# Altium PCB KATADC_V1-3.PcbDoc (part 1 of 7)
Units mm, origin at the board's own origin, x right, y up, seen from the top; angles counter-clockwise.
Board outline 127 x 85.85 mm, 6 copper layers (Top Layer, InnerPlane1, InnerPlane2, InnerPlane3, InnerPlane4, Bottom Layer), stack 1.255 mm thick; 189 components, 188 nets, 905 pads, 1090 vias.
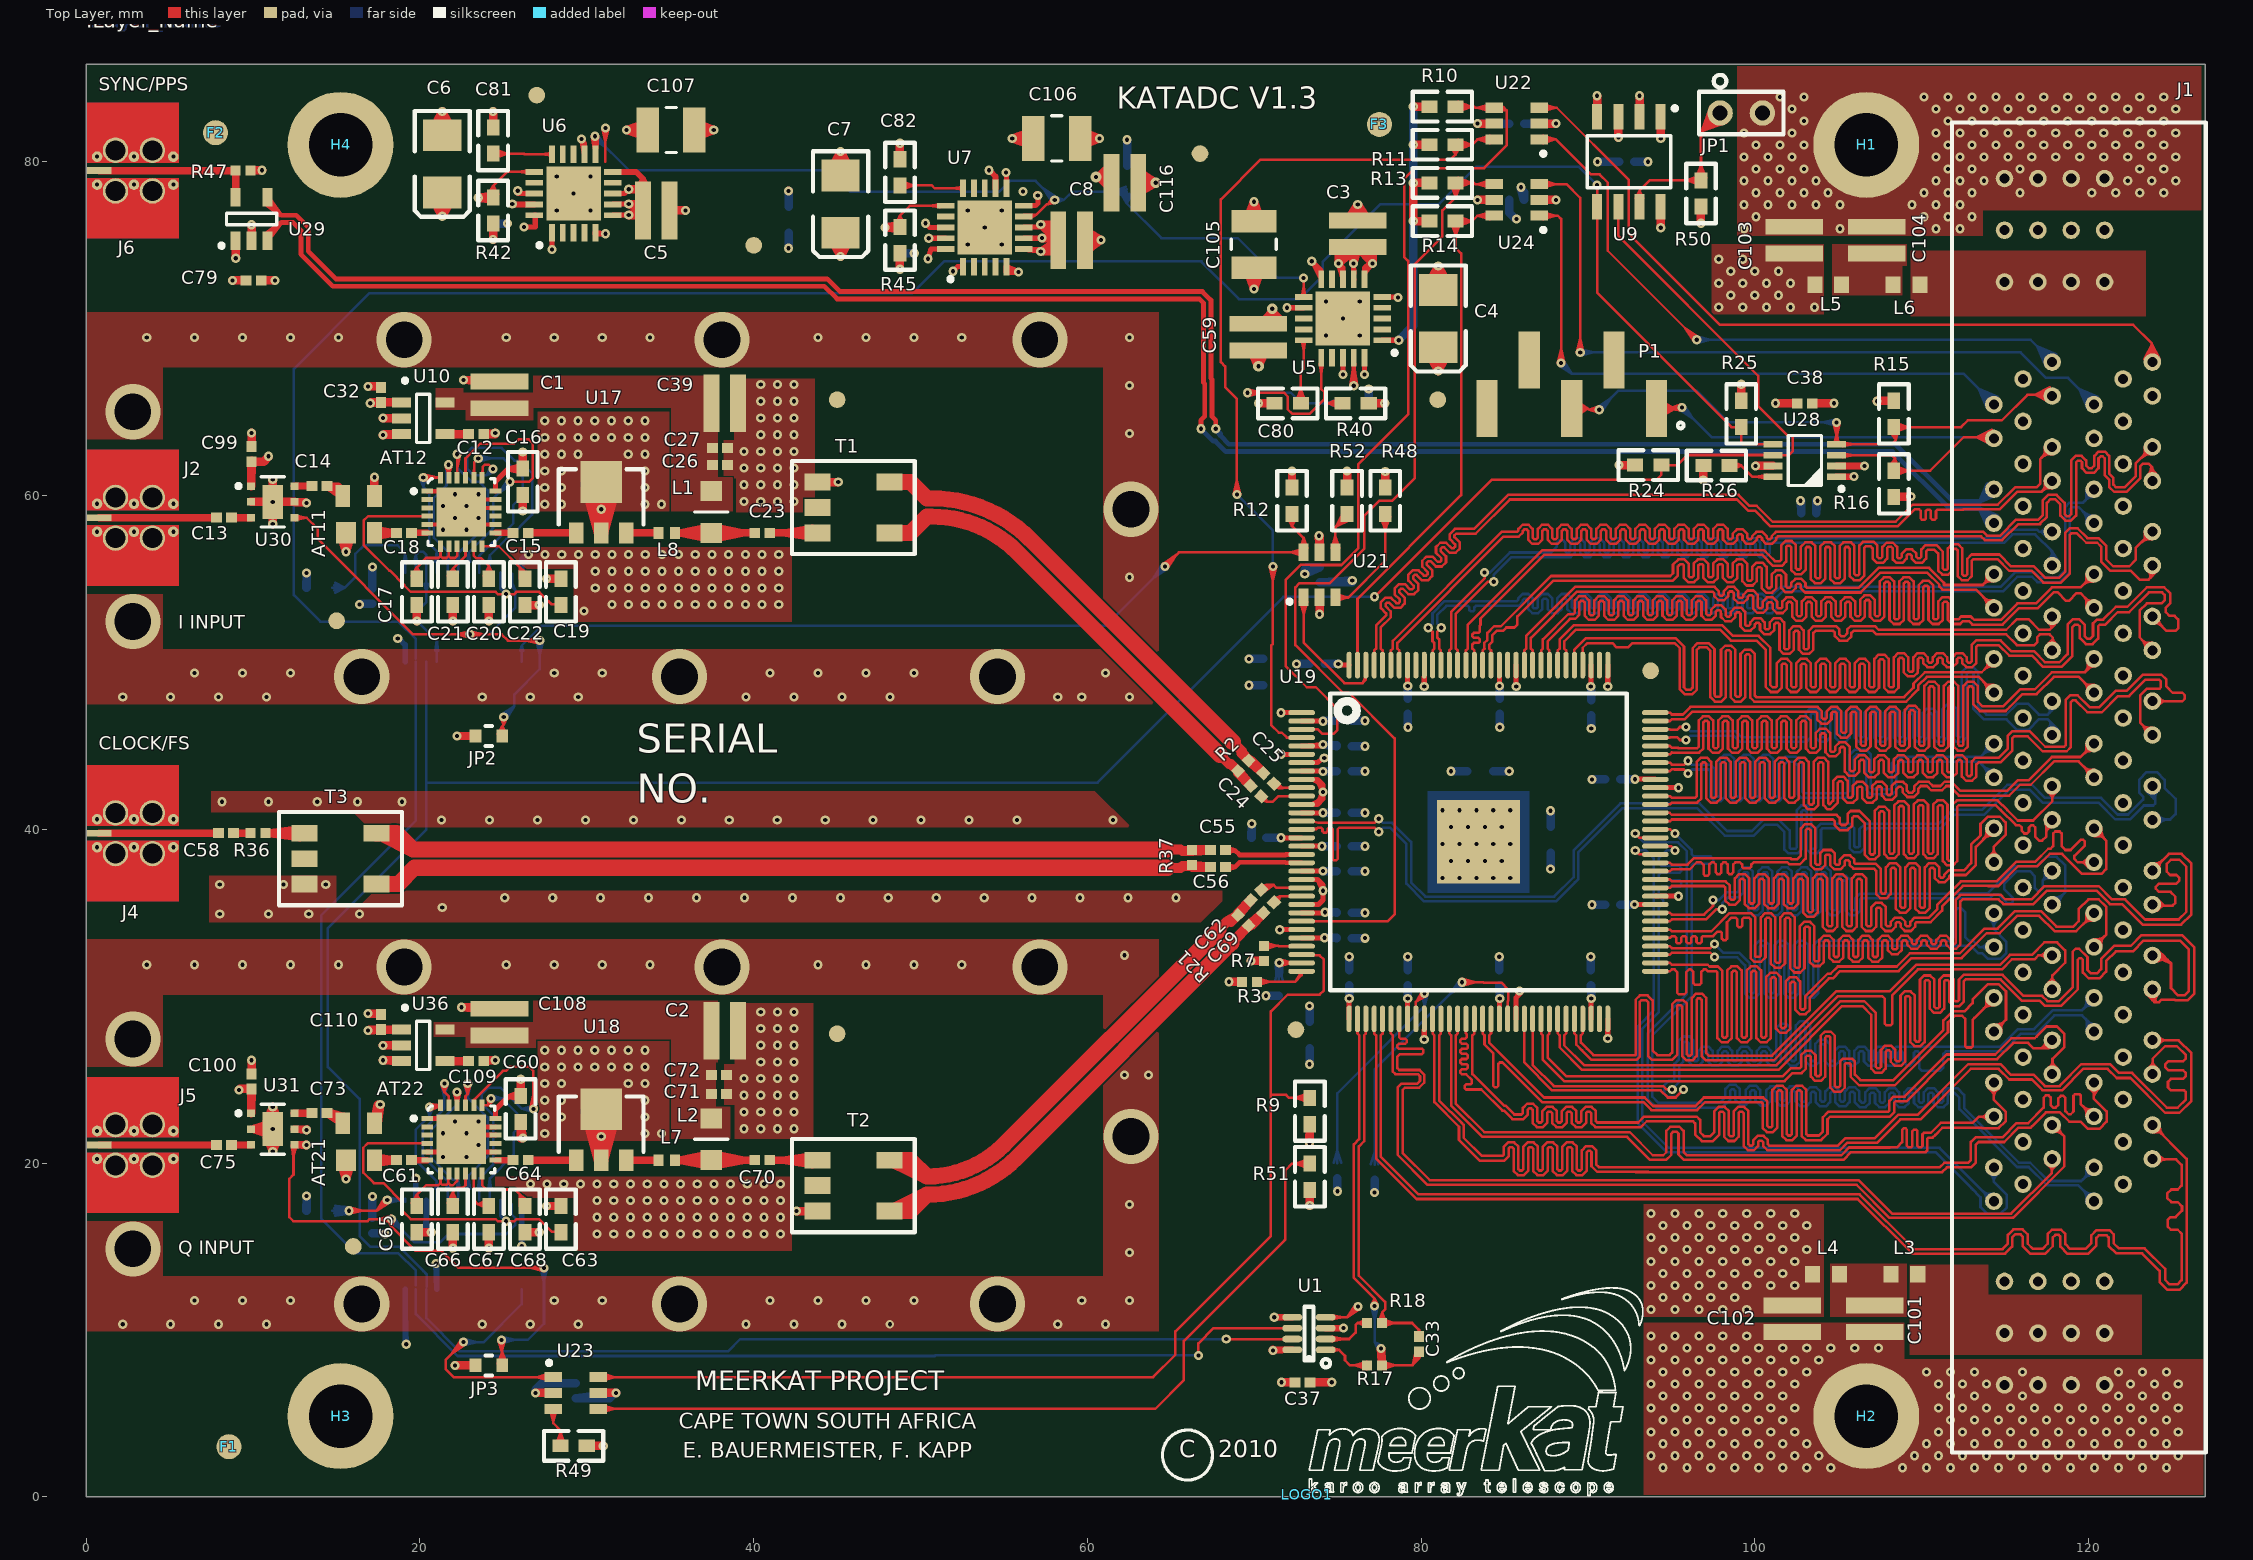
[diagram p0: Top Layer view]
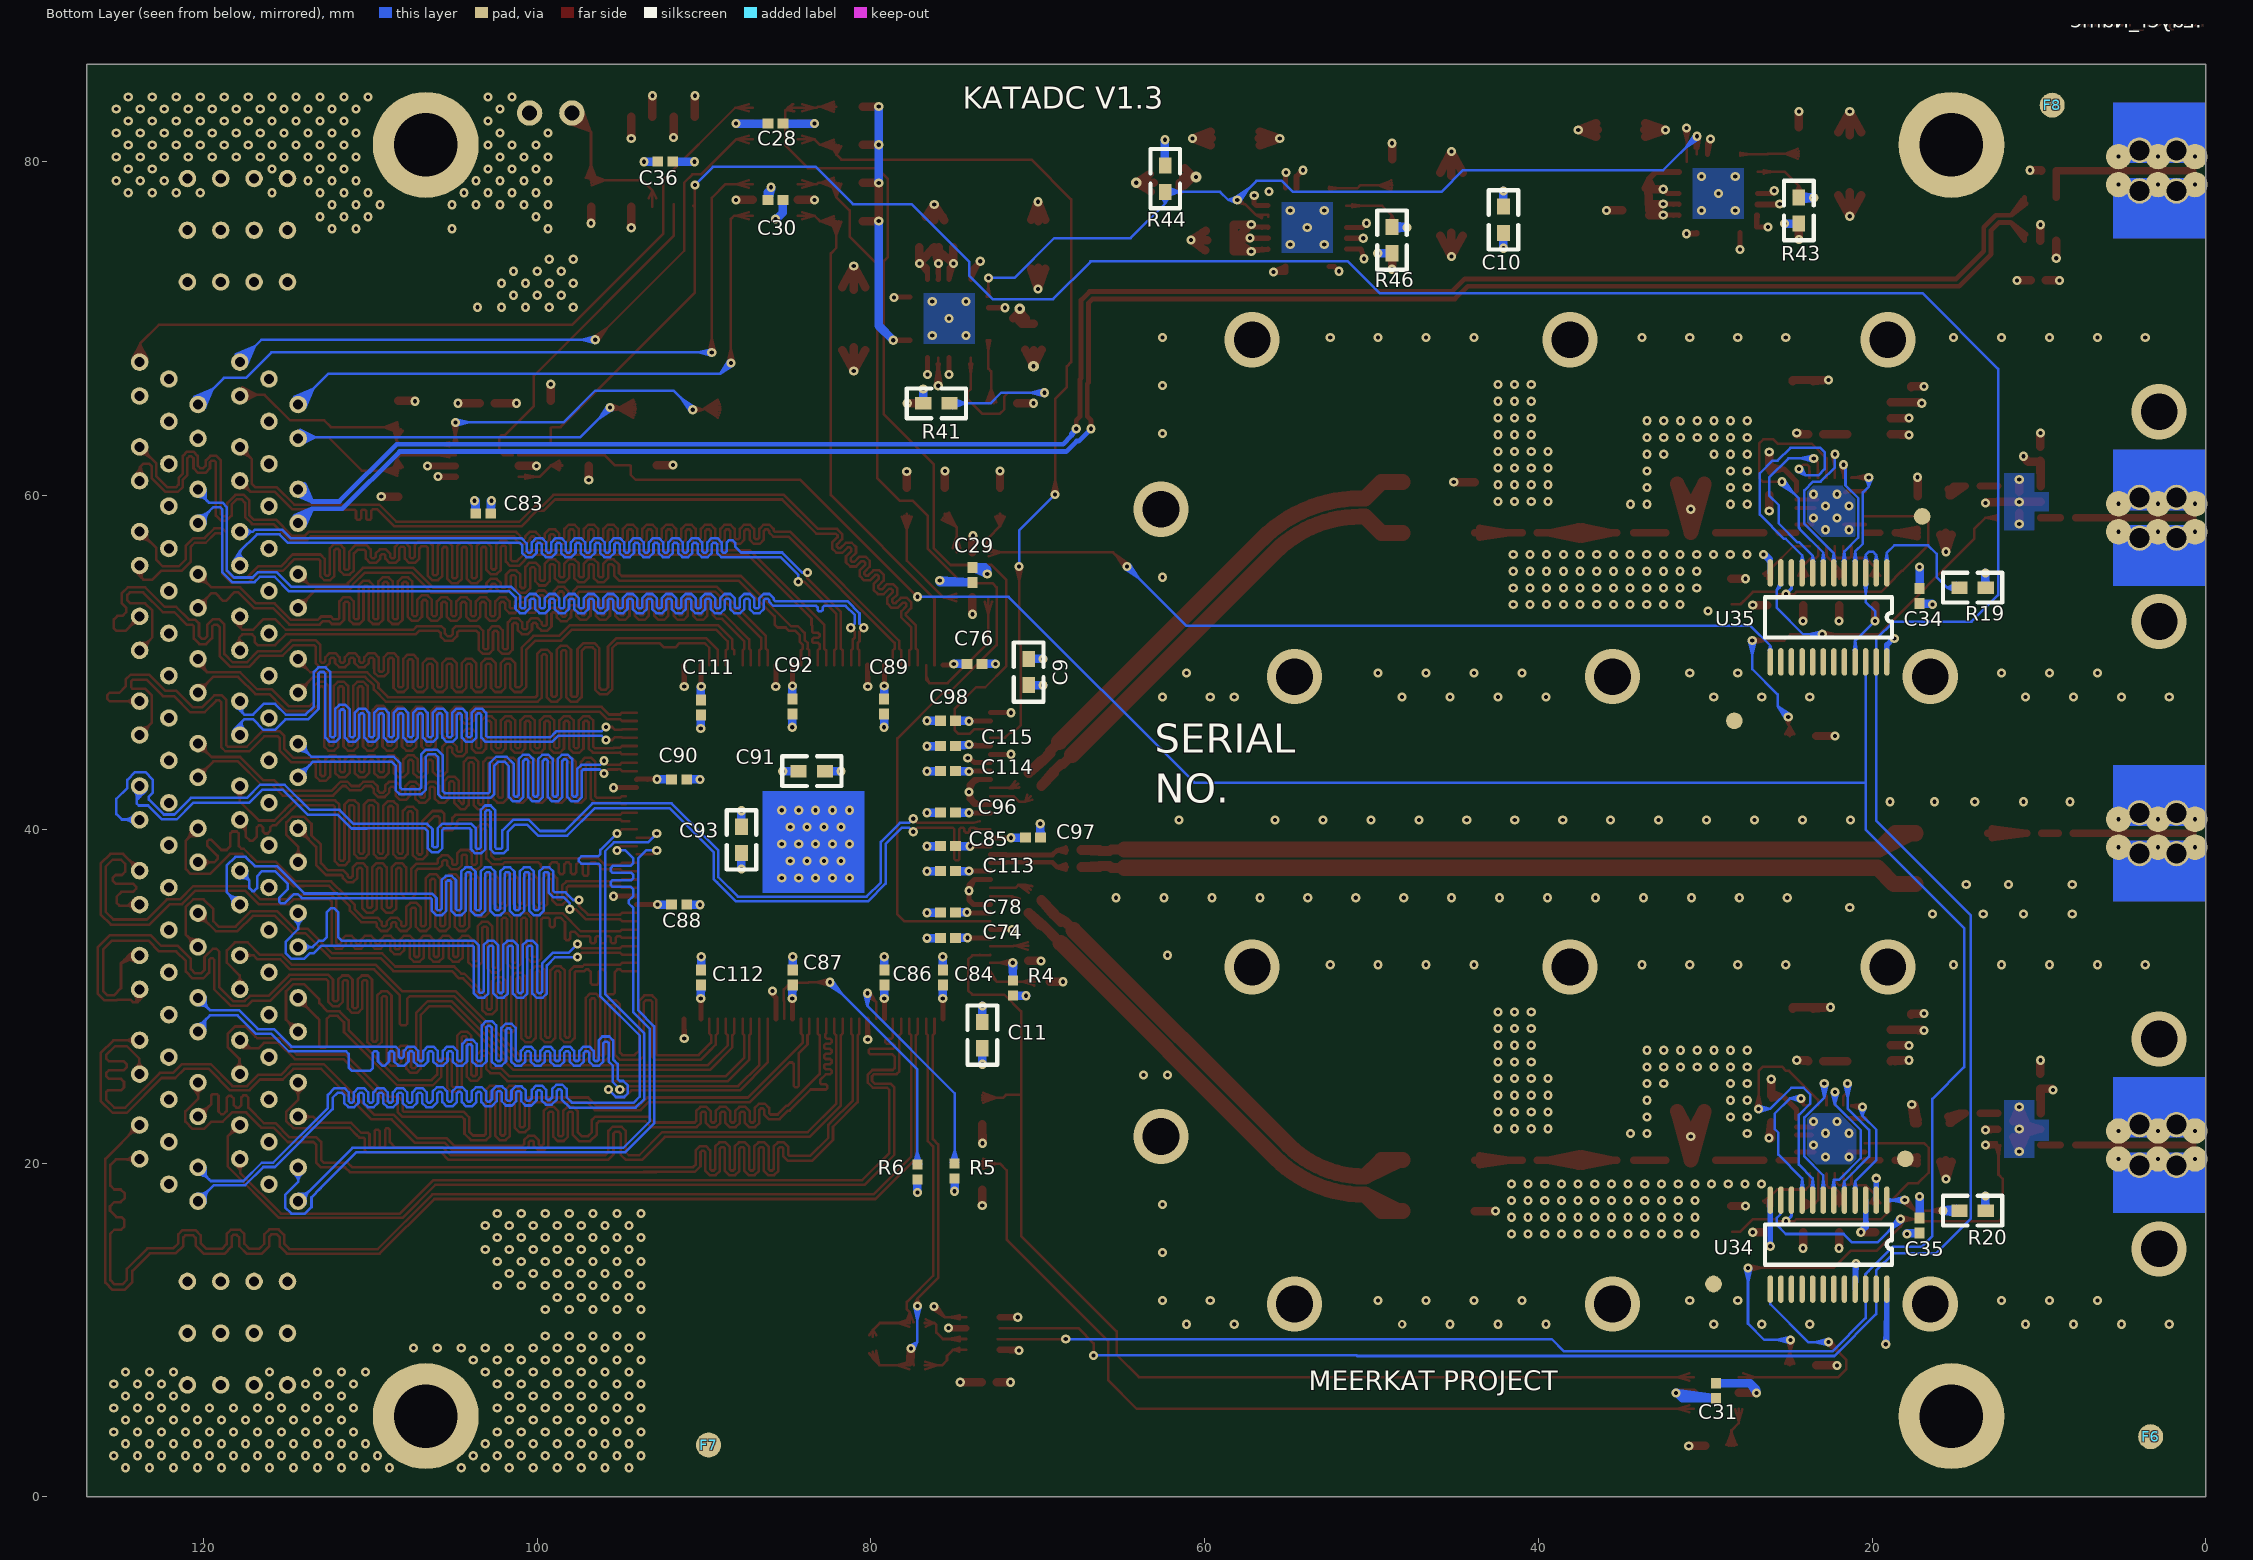
[diagram p1: Bottom Layer view, seen from below]
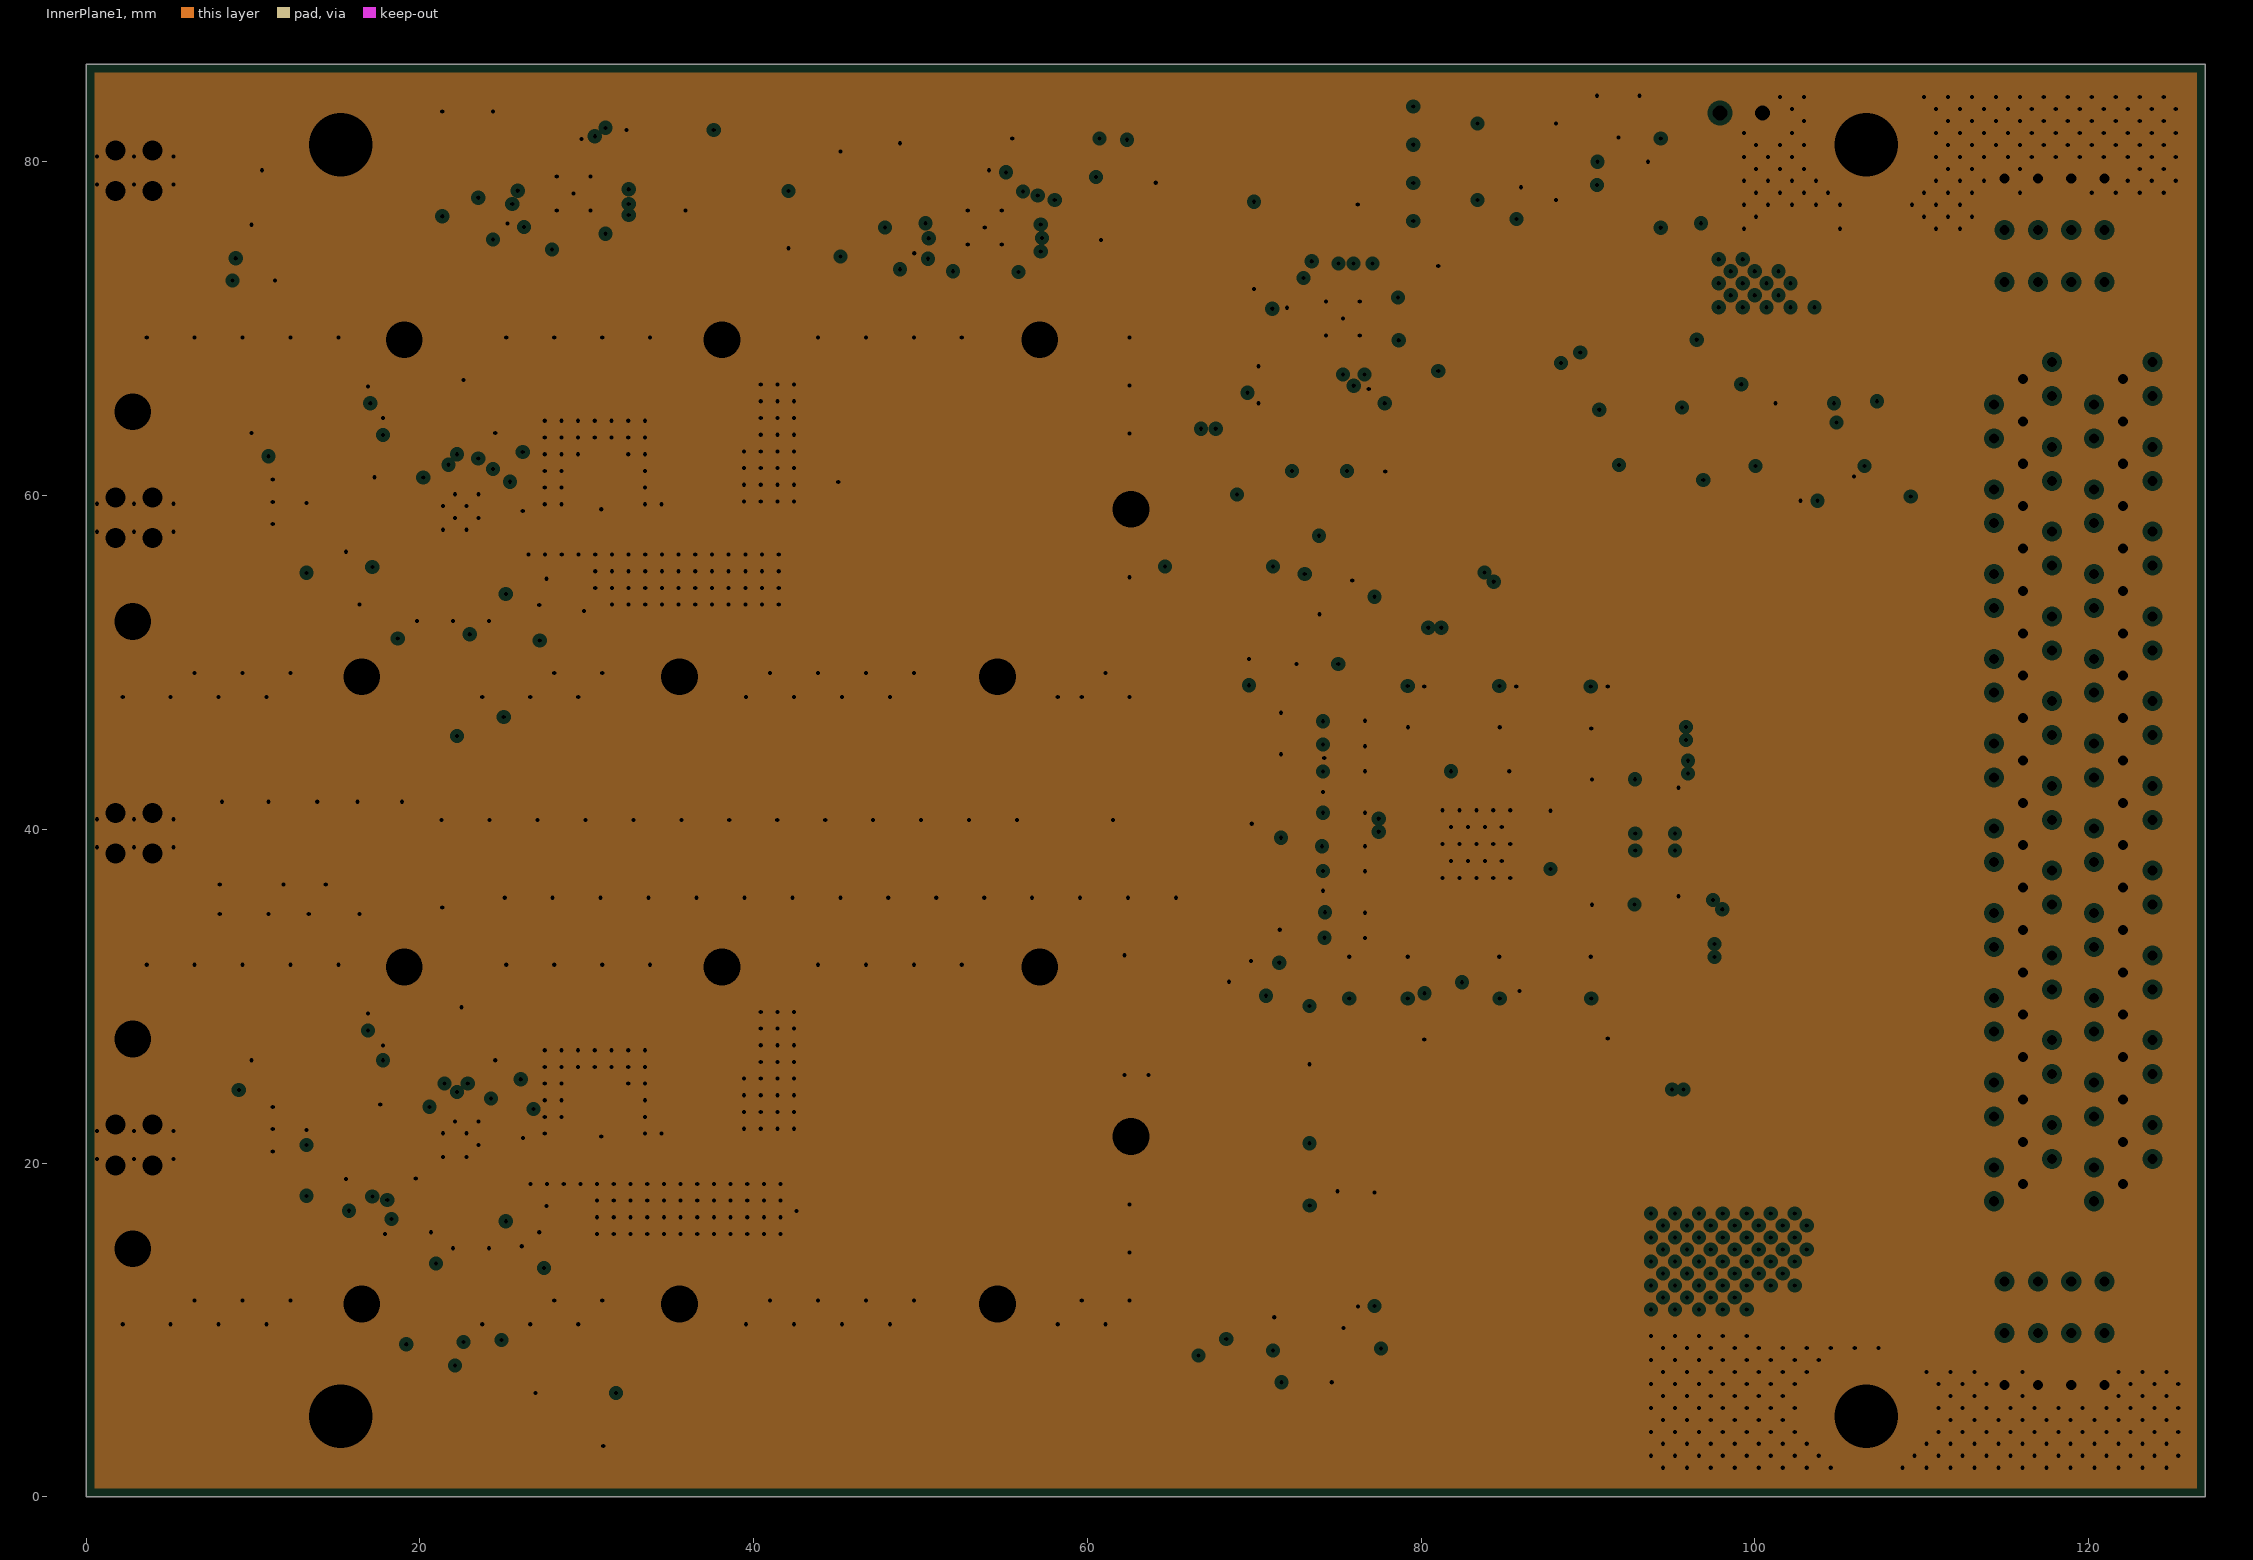
[diagram p2: InnerPlane1, clearances drawn from the general rule]
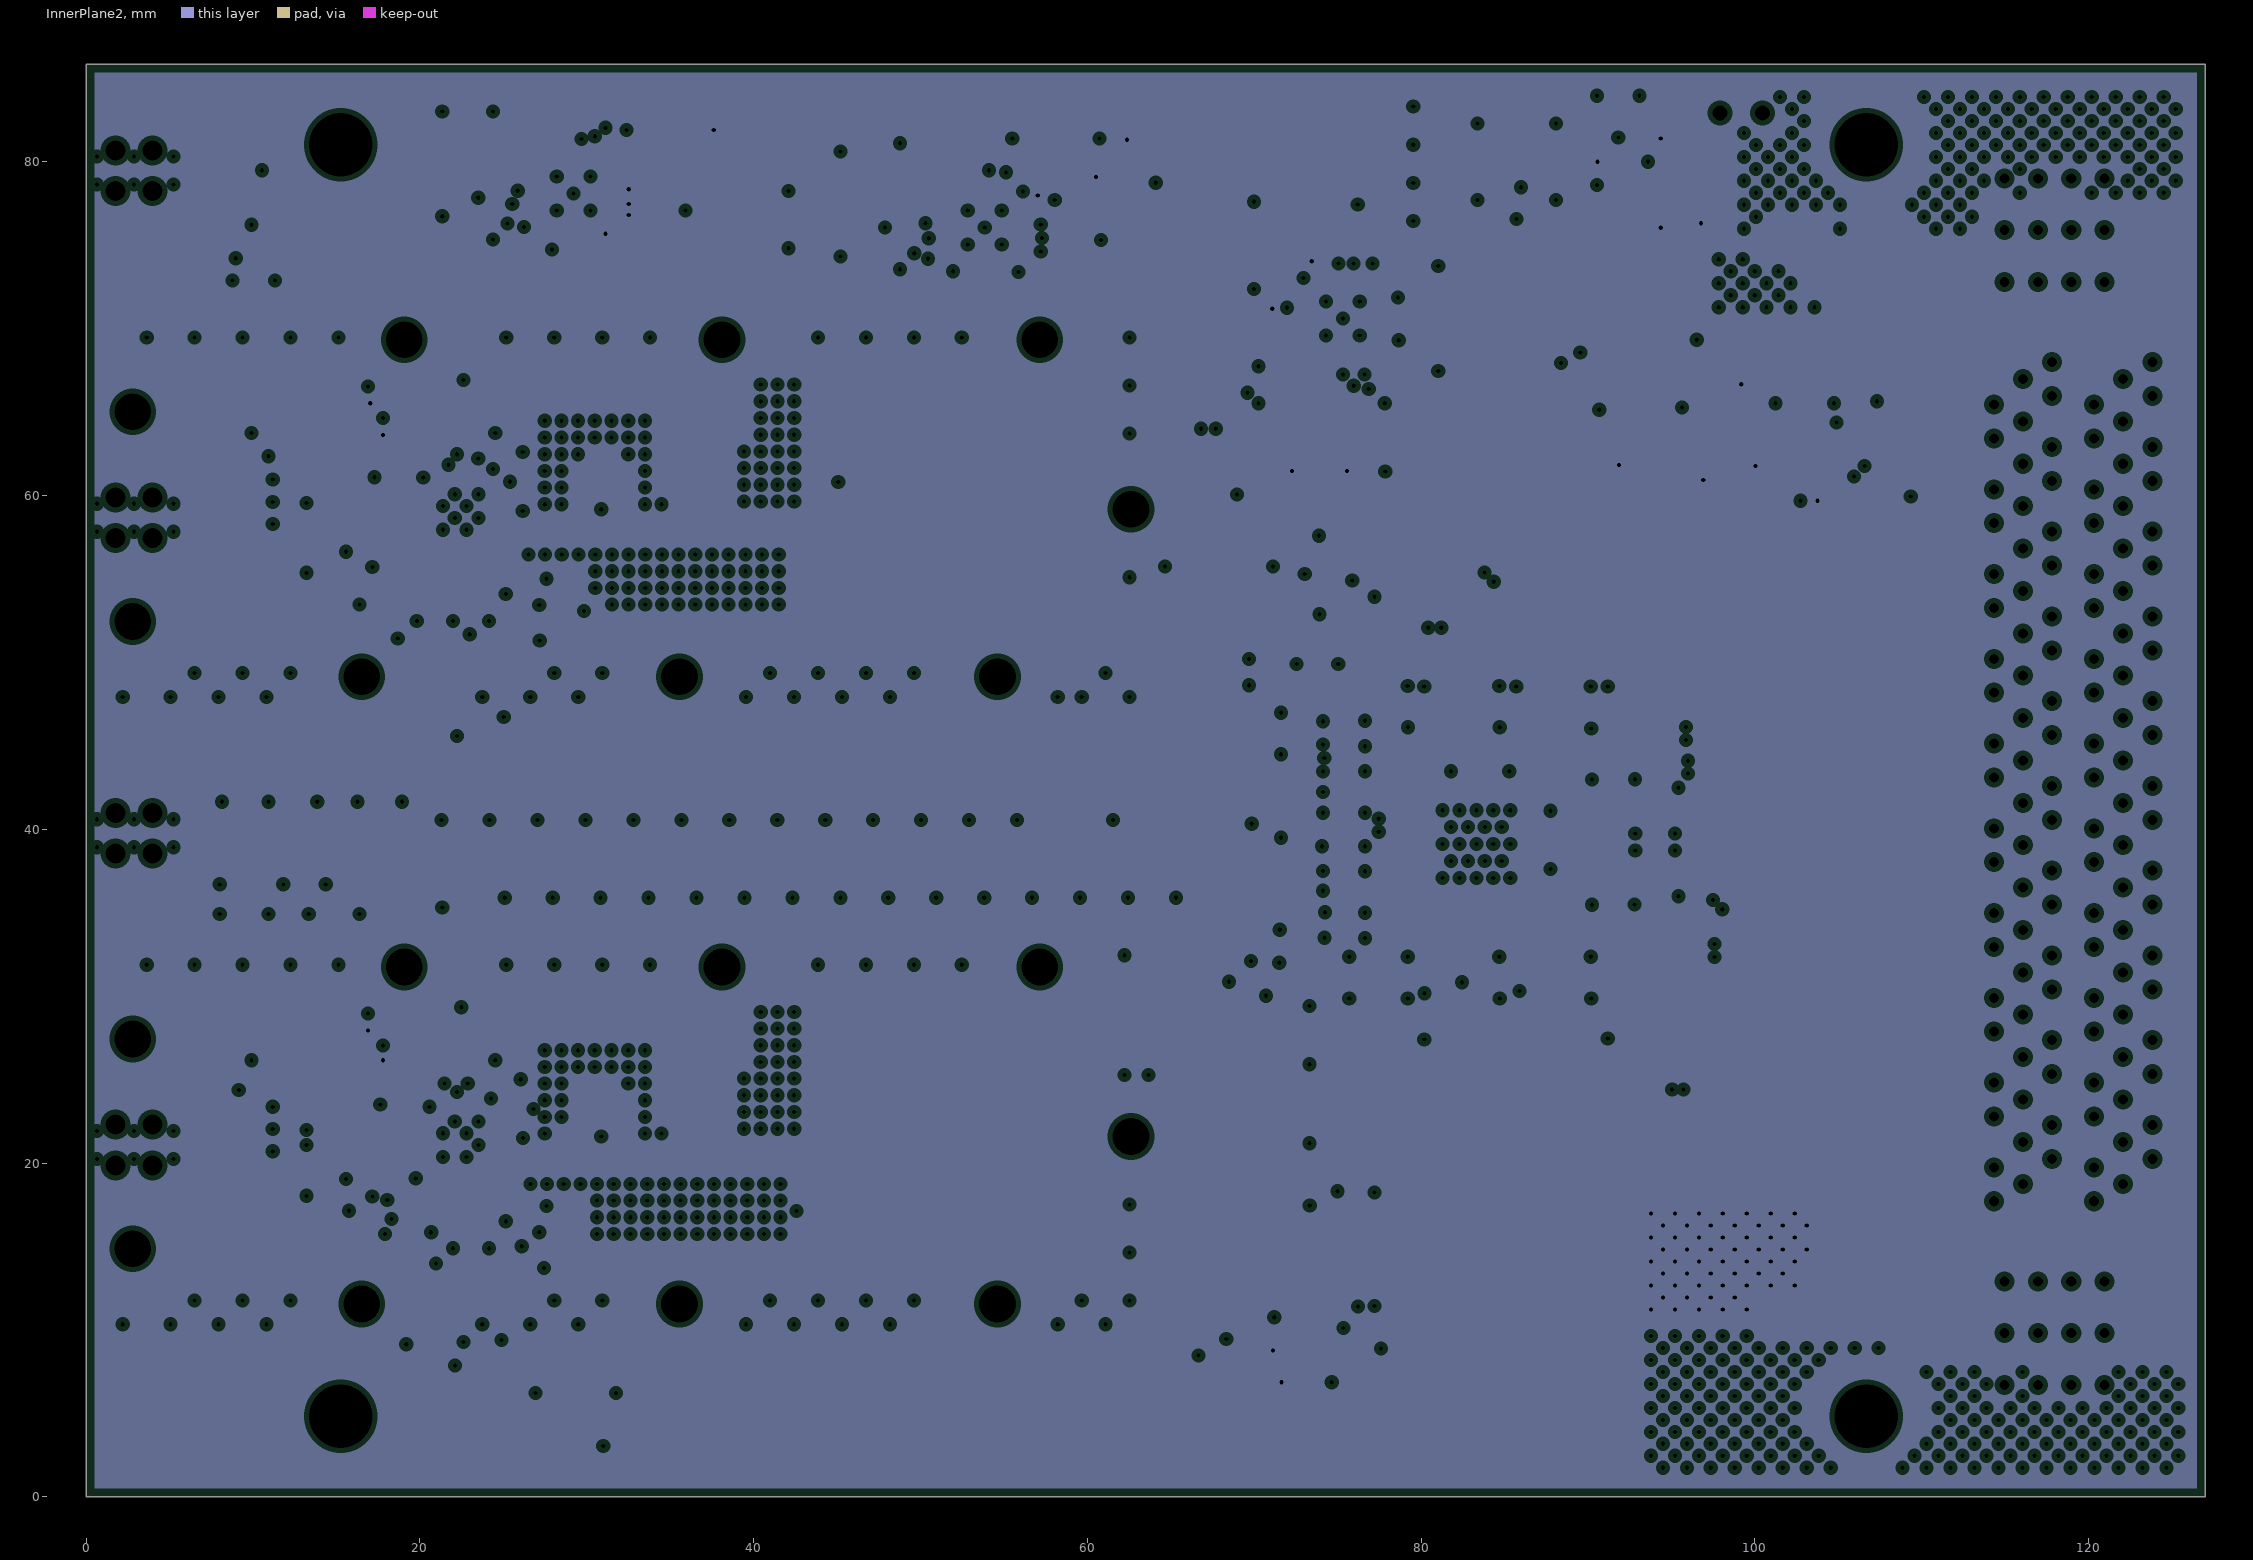
[diagram p3: InnerPlane2, clearances drawn from the general rule]
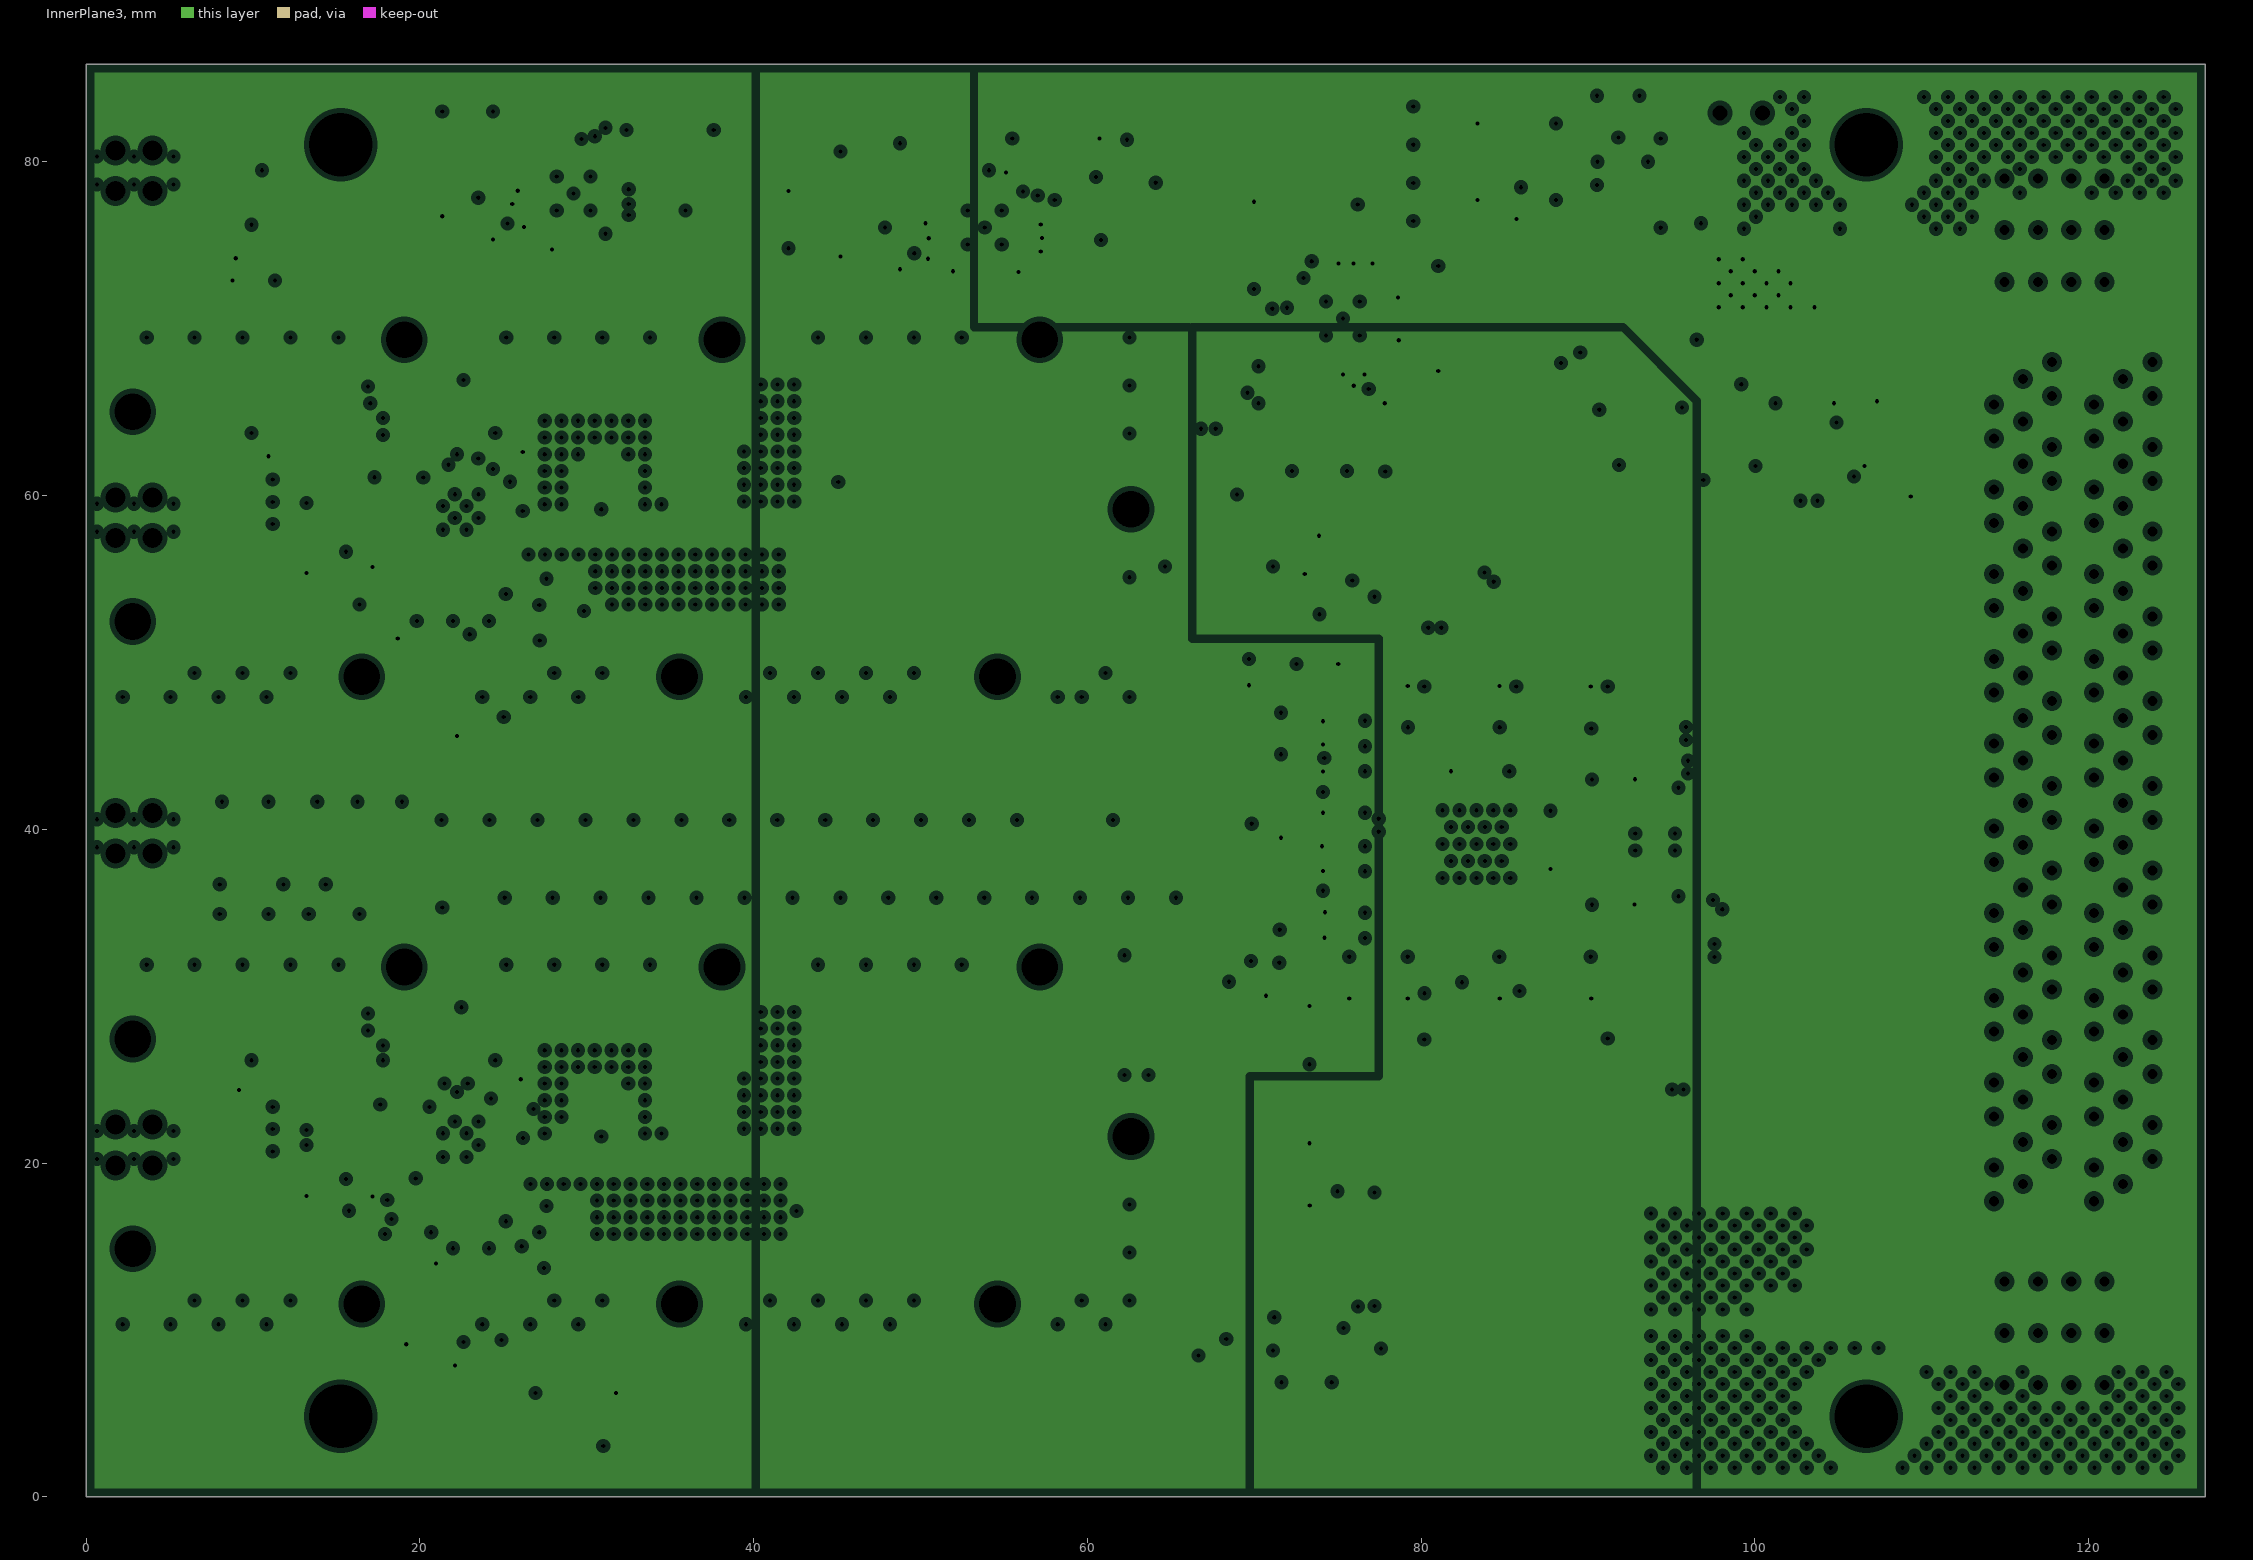
[diagram p4: InnerPlane3, clearances drawn from the general rule]
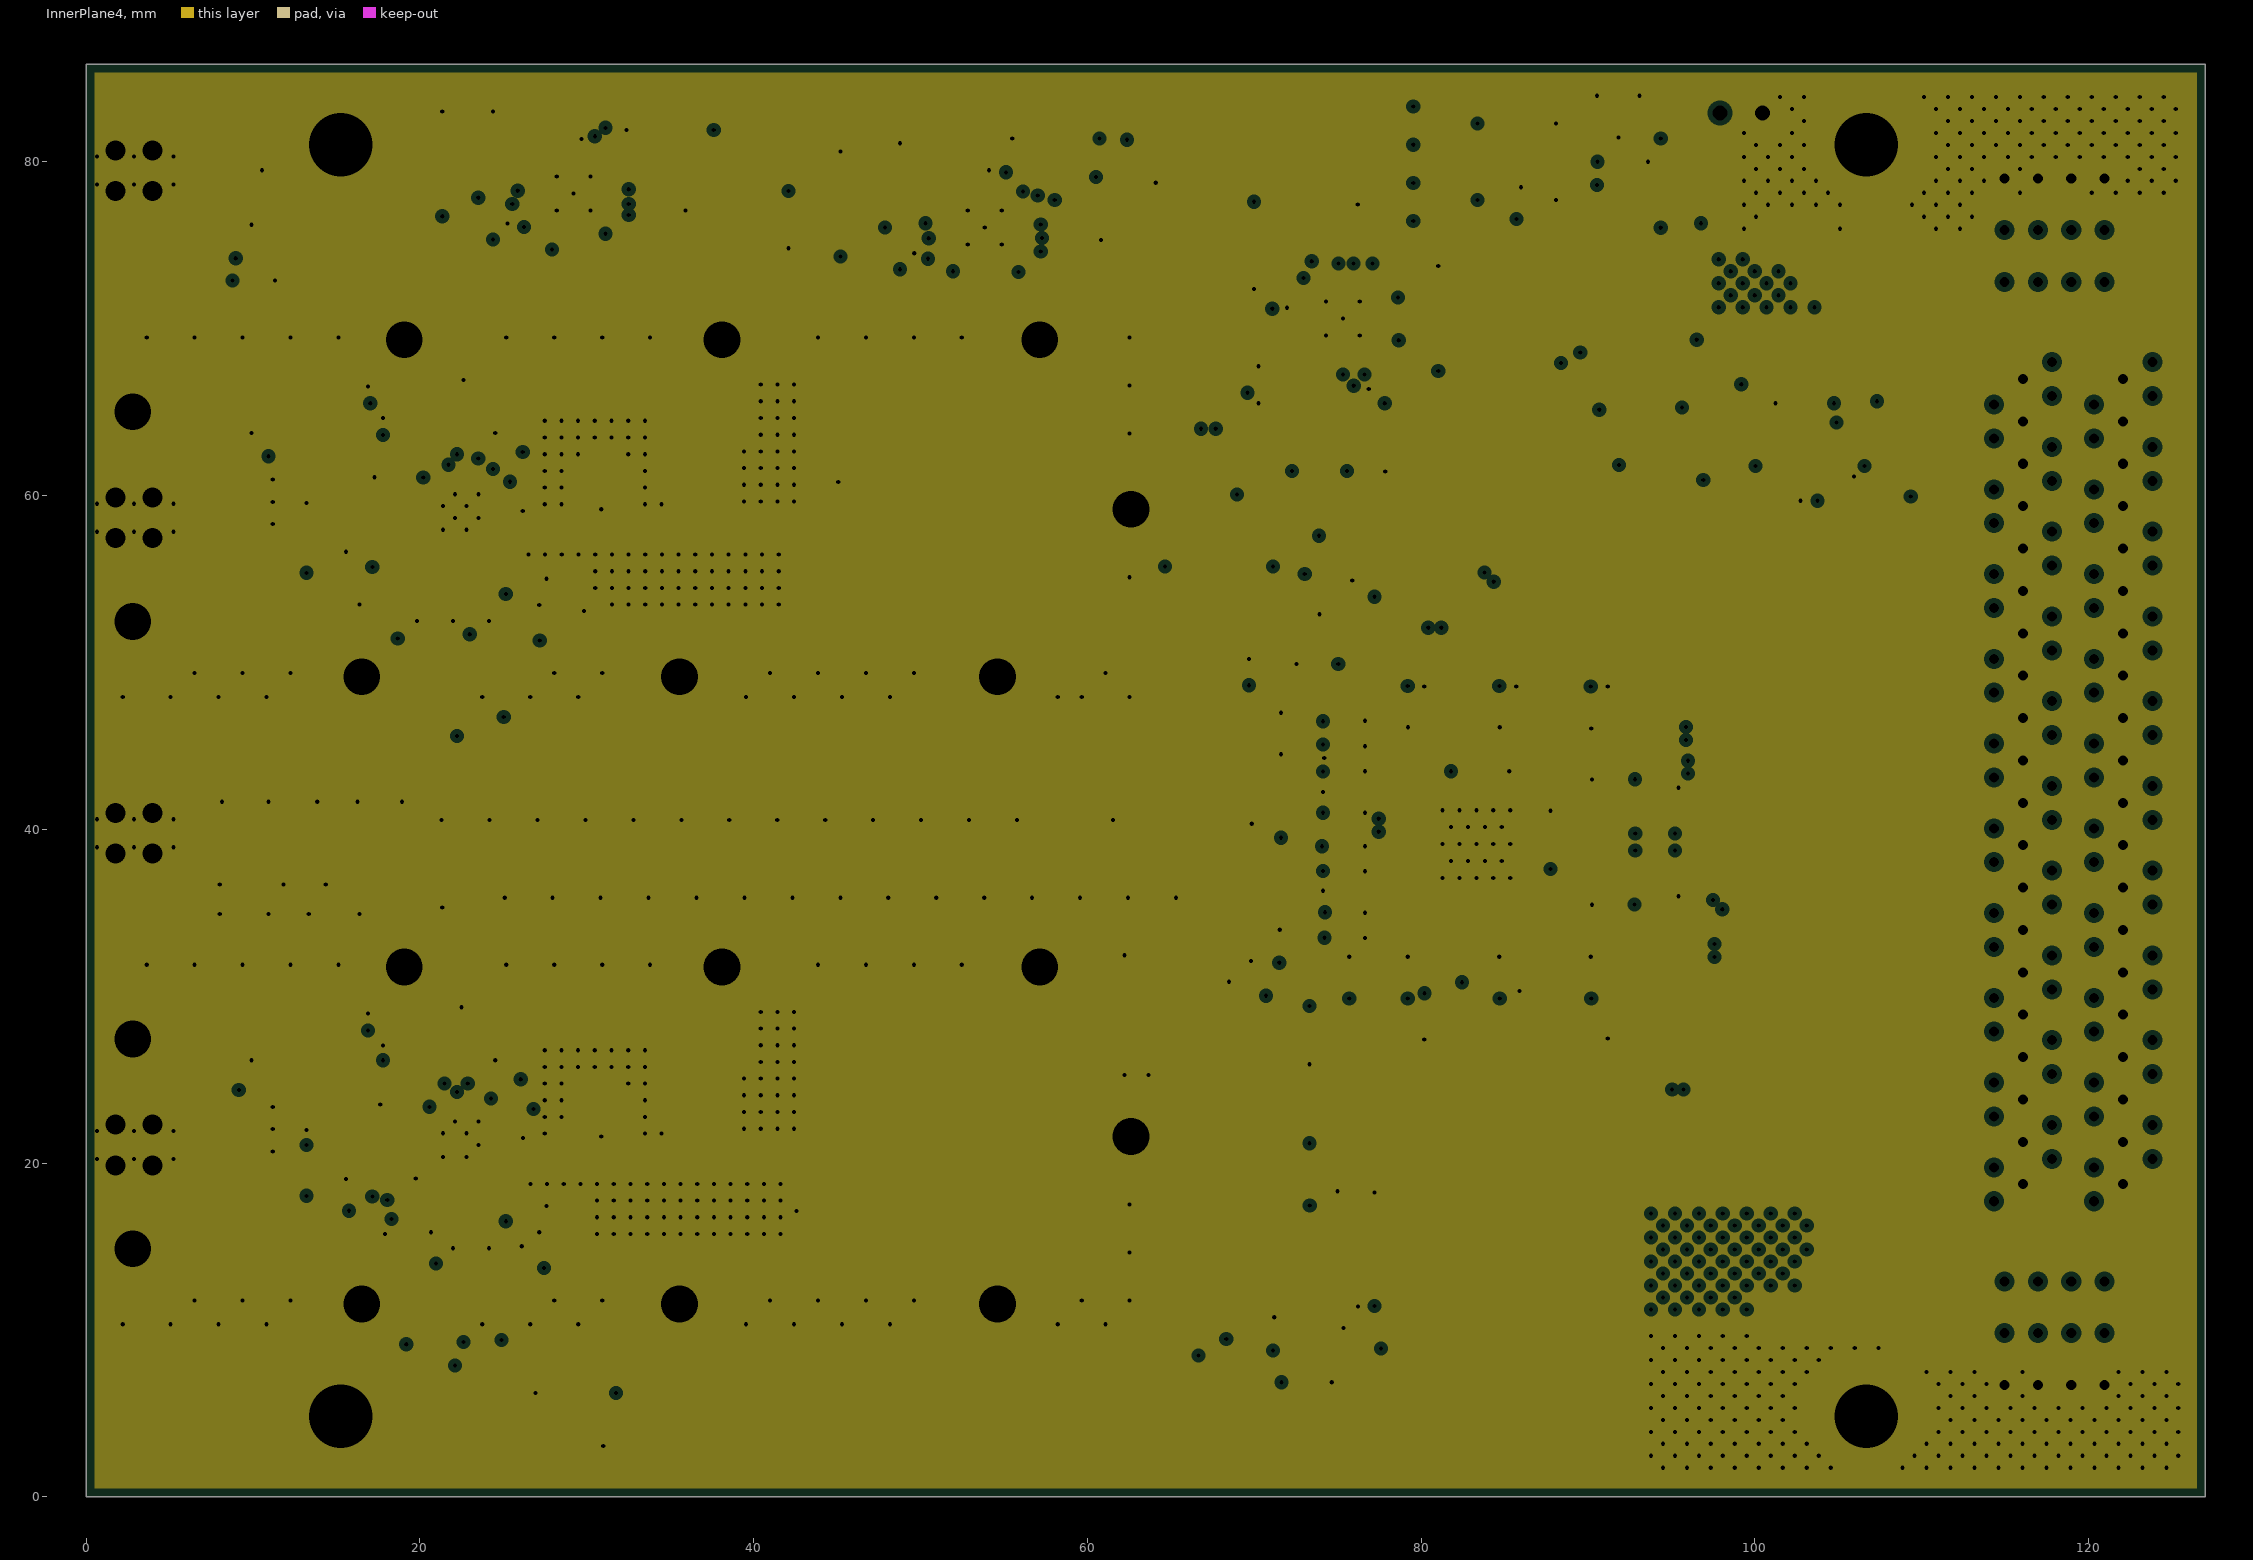
[diagram p5: InnerPlane4, clearances drawn from the general rule]

## Layer stack, top to bottom
Top Layer: signal copper 0.015
Dielectric: prepreg 0.175, FR-4, Dk 4.8
InnerPlane1: plane copper 0.015, net GND
Dielectric: core 0.32, FR-4, Dk 4.8
InnerPlane2: plane copper 0.015, net +5V
Dielectric: prepreg 0.175, FR-4, Dk 4.8
InnerPlane3: plane copper 0.015, net (Multiple Nets)
Dielectric: core 0.32, FR-4, Dk 4.8
InnerPlane4: plane copper 0.015, net GND
Dielectric: prepreg 0.175, FR-4, Dk 4.8
Bottom Layer: signal copper 0.015

## Board outline
0,0 127,0 127,85.85 0,85.85

## Design rules (kind name [scope] priority, off if disabled: settings)
Clearance Clearance_Diffs [InNetClass('RowA-Matched')   AND InNetClass('RowB-Matched') AND InNetClass('RowC-Matched') AND InNetClass('RowD-Matched')] p1: gap=0.127
Clearance Clearance_General [All] p2: gap=0.1
ComponentClearance [IsComponent and OnMechanical] p1: gap=0.2 collisioncheckmode=3 verticalgap=0.2 showdistances=FALSE
DiffPairsRouting [All] p1 off: maxlimit=0.003 minlimit=0.003 mostfreqgap=0.003 maxuncoupledlength=12.7
FabricationTestPointUsage TestPointUsage [All] p1 off: valid=0 allowmultiple=FALSE
FabricationTestpoint Testpoint [(IsPad And (OnTopLayer Or OnBottomLayer))] p1 off: side=3 testpointundercomponent=TRUE minsize=1.016 maxsize=2.54 preferedsize=1.524 minholesize=0 maxholesize=1.016 preferedholesize=0.813 testpointgrid=0.025 allowsidetop=TRUE allowsidebottom=TRUE usegrid=TRUE gridtolerance=0
FanoutControl Fanout_BGA [IsBGA] p1 off: bgadir=Out bgaviamode=Centered fanoutstyle=Auto fanoutdirection=Alternating viagrid=0.025 // Fanout_BGA (Default Rule)
FanoutControl Fanout_LCC [IsLCC] p2 off: bgadir=Out bgaviamode=Centered fanoutstyle=Auto fanoutdirection=Alternating viagrid=0.025 // Fanout_LCC (Default Rule)
FanoutControl Fanout_SOIC [IsSOIC] p3 off: bgadir=Out bgaviamode=Centered fanoutstyle=Auto fanoutdirection=Alternating viagrid=0.025 // Fanout_SOIC (Default Rule)
FanoutControl Fanout_Small [(CompPinCount < 5)] p4 off: bgadir=Out bgaviamode=Centered fanoutstyle=Auto fanoutdirection=OutThenIn viagrid=0.025 // Fanout_Small (Default Rule)
FanoutControl Fanout_Default [All] p5 off: bgadir=Out bgaviamode=Centered fanoutstyle=Auto fanoutdirection=Alternating viagrid=0.025 // Fanout_Default (Default Rule)
HoleSize [All] p1 off: absolutevalues=TRUE maxlimit=12 minlimit=0.2 maxpercent=80.000 minpercent=20.000
LayerPairs [All] p1 off: enforce=TRUE
Length Length_RowD [InNetClass('RowD-Matched')] p1: maxlimit=56.439 minlimit=56.337
Length Length_RowC [InNetClass('RowC-Matched')] p2: maxlimit=66.142 minlimit=66.04
Length Length_RowF [InNetClass('RowB-Matched')] p3: maxlimit=46.736 minlimit=46.634
Length Length_RowA [InNetClass('RowA-Matched')] p4: maxlimit=75.87 minlimit=75.768
PlaneClearance [All] p1 off: clearance=0.3
PlaneConnect Planevia [isvia] p1: planeconnectstyle=Direct reliefexpansion=0.508 reliefentries=4 reliefconductorwidth=0.254 reliefairgap=0.254
PlaneConnect [All] p2: planeconnectstyle=Direct reliefexpansion=0.3 reliefentries=2 reliefconductorwidth=0.4 reliefairgap=0.2
PolygonConnect "Pwr via" [All] p1: connectstyle=Direct reliefconductorwidth=0.254 reliefentries=4 polygonreliefangle="90 Angle"
PolygonConnect [All] p2: connectstyle=Relief reliefconductorwidth=0.5 reliefentries=4 polygonreliefangle="90 Angle"
RoutingCorners [All] p1: cornerstyle=45-Degree minsetback=2.5 maxsetback=2.5
RoutingPriority [All] p1 off: routingpriority=0
RoutingTopology [All] p1 off: topology=Shortest
RoutingVias "Pwr Vias" [Isvia] p1: holewidth=0.3 width=0.65 viastyle="Through Hole" minholewidth=0.3 minwidth=0.65 maxholewidth=0.3 maxwidth=0.65
RoutingVias RoutingVias_General [All] p2: holewidth=0.3 width=0.65 viastyle="Through Hole" minholewidth=0.3 minwidth=0.65 maxholewidth=0.3 maxwidth=0.65
SilkscreenOverComponentPads [All] p1: minsilkscreentomaskgap=0.254
SolderMaskExpansion [All] p1: expansion=0.06
ViasUnderSMD [All] p1: allowed=FALSE
Width Width_Power [All] p1: maxlimit=1 minlimit=0.15 preferedwidth=0.5
Width [All] p2: maxlimit=1 minlimit=0.15 preferedwidth=0.175
11 further rules are at their usual default settings.

## Classes and differential pairs
net class RowA-Matched: DCLK_RST+ DCLK_RST- DI0+ DI0- DI4+ DI4- DID1+ DID1- DID4+ DID4- DQ0+ DQ0- DQ4+ DQ4- DQD0+ DQD0- DQD4+ DQD4-
net class RowC-Matched: DCLK+ DCLK- DI2+ DI2- DI6+ DI6- DID2+ DID2- DID6+ DID6- DQ2+ DQ2- DQ6+ DQ6- DQD2+ DQD2- DQD6+ DQD6-
net class RowF-Matched: DI1+ DI1- DI5+ DI5- DID5+ DID5- DQ3+ DQ3- DQ7+ DQ7- DQD3+ DQD3- DQD7+ DQD7- OR+/DCLK2+ OR-/DCLK2-
net class RowD-Matched: DI3+ DI3- DI7+ DI7- DID0+ DID0- DID3+ DID3- DID7+ DID7- DQ1+ DQ1- DQ5+ DQ5- DQD1+ DQD1- DQD5+ DQD5-

## Components (designator, comment, footprint, x,y, rotation, side; value= is the part's Value field where it differs from the comment)
AT11 "Value" MINICIRCUITS_MMM168 17.272,59.974 r0 top locked
AT12 "HMC624LP4" QFN50P400X400X100-25USR 22.479,59.014 r0 top locked
AT21 "Value" MINICIRCUITS_MMM168 17.272,22.382 r0 top locked
AT22 "HMC624LP4" QFN50P400X400X100-25USR 22.479,21.422 r0 top locked
C1 "Footprint ???" CAPC1632X80USR 24.765,66.04 r90 top locked
C2 "*" CAPC1632X80USR 38.265,27.94 r0 top locked
C3 "Footprint ???" CAPC1632X80USR 76.2,75.692 r90 top locked
C4 "33uF" 3528 81.026,70.612 r270 top locked
C5 "Footprint ???" CAPC1632X80USR 34.163,77.089 r0 top locked
C6 "33uF" 3528 21.336,79.883 r270 top locked
C7 "33uF" 3528 45.212,77.47 r270 top locked
C8 "Footprint ???" CAPC1632X80USR 59.055,75.311 r0 top locked
C9 "100nF" 0603 70.543,49.426 r270 bottom locked
C10 "100nF" 0603 42.088,76.53 r90 bottom locked
C11 "100nF" 0603 73.32,27.668 r90 bottom locked
C12 "Capacitor 0402 SMD" CAPC1005X55N 23.368,63.685 r0 top locked
C13 "Capacitor 0402 SMD" CAPC1005X55N 8.255,58.674 r0 top locked
C14 "Footprint ???" CAPC1005X55N 13.97,60.579 r0 top locked
C15 "Footprint ???" CAPC1005X55N 26.035,57.764 r0 top locked
C16 "Footprint ???" 0603 26.162,60.833 r270 top locked
C17 "Footprint ???" 0603 19.812,54.229 r270 top locked
C18 "*" CAPC1005X55N 19.05,57.764 r0 top locked
C19 "*" 0603 28.448,54.229 r90 top locked
C20 "Footprint ???" 0603 24.13,54.229 r270 top locked
C21 "Footprint ???" 0603 21.971,54.229 r270 top locked
C22 "Footprint ???" 0603 26.289,54.229 r270 top locked
C23 "Footprint ???" CAPC1005X55N 40.513,57.764 r0 top locked
C24 "Capacitor 0402 SMD" CAPC1005X55N 70.104,42.291 r315 top locked
C25 "Capacitor 0402 SMD" CAPC1005X55N 70.866,43.053 r315 top locked
C26 "*" CAPC1005X55N 37.973,61.849 r0 top locked
C27 "Footprint ???" CAPC1005X55N 37.973,62.865 r0 top locked
C28 "Capacitor 0402 SMD" CAPC1005X55N 85.725,82.296 r180 bottom locked
C29 "Capacitor 0402 SMD" CAPC1005X55N 73.914,55.245 r90 bottom locked
C30 "Capacitor 0402 SMD" CAPC1005X55N 85.725,77.724 r180 bottom locked
C31 "Capacitor 0402 SMD" CAPC1005X55N 29.337,6.35 r270 bottom locked
C32 "Capacitor 0402 SMD" CAPC1005X55N 17.653,66.04 r90 top locked
C33 "*" CAPC1005X55N 79.883,9.144 r90 top locked
C34 "Capacitor 0402 SMD" CAPC1005X55N 17.145,53.975 r270 bottom locked
C35 "Capacitor 0402 SMD" CAPC1005X55N 17.145,16.256 r270 bottom locked
C36 "100nF" CAPC1005X55N 92.329,80.01 r0 bottom locked
C37 "Capacitor 0402 SMD" CAPC1005X55N 72.898,6.858 r180 top locked
C38 "10nF" CAPC1005X55N 102.997,65.532 r0 top locked
C39 "Footprint ???" CAPC1632X80USR 38.265,65.532 r0 top locked
C55 "Capacitor 0402 SMD" CAPC1005X55N 67.818,38.751 r0 top locked
C56 "Capacitor 0402 SMD" CAPC1005X55N 67.818,37.735 r0 top locked
C58 "*" CAPC1005X55N 8.382,39.767 r0 top locked
C59 "Footprint ???" CAPC1632X80USR 70.25,69.5 r270 top locked
C60 "Footprint ???" 0603 26.035,23.241 r270 top locked
C61 "*" CAPC1005X55N 19.05,20.172 r0 top locked
C62 "Capacitor 0402 SMD" CAPC1005X55N 70.104,36.068 r45 top locked
C63 "*" 0603 28.448,16.637 r90 top locked
C64 "*" CAPC1005X55N 26.035,20.172 r0 top locked
C65 "*" 0603 19.812,16.637 r270 top locked
C66 "*" 0603 21.971,16.637 r270 top locked
C67 "*" 0603 24.13,16.637 r270 top locked
C68 "*" 0603 26.289,16.637 r270 top locked
C69 "Capacitor 0402 SMD" CAPC1005X55N 70.866,35.306 r45 top locked
C70 "Footprint ???" CAPC1005X55N 40.513,20.172 r0 top locked
C71 "*" CAPC1005X55N 37.915,24.13 r0 top locked
C72 "*" CAPC1005X55N 37.915,25.273 r0 top locked
C73 "*" CAPC1005X55N 13.97,22.987 r0 top locked
C74 "Capacitor 0402 SMD" CAPC1005X55N 75.387,33.477 r0 bottom locked
C75 "*" CAPC1005X55N 8.255,21.082 r0 top locked
C76 "Capacitor 0402 SMD" CAPC1005X55N 73.787,49.911 r180 bottom locked
C78 "Capacitor 0402 SMD" CAPC1005X55N 75.387,35.001 r0 bottom locked
C79 "Footprint ???" CAPC1005X55N 10.033,72.898 r180 top locked
C80 "Footprint ???" 0603 72.009,65.532 r180 top locked
C81 "Footprint ???" 0603 24.384,81.28 r90 top locked
C82 "*" 0603 48.768,79.375 r90 top locked
C83 "Capacitor 0402 SMD" CAPC1005X55N 103.236,58.937 r180 bottom locked
C84 "*" CAPC1005X55N 75.692,31.115 r90 bottom locked
C85 "Capacitor 0402 SMD" CAPC1005X55N 75.387,38.989 r0 bottom locked
C86 "Capacitor 0402 SMD" CAPC1005X55N 79.197,31.115 r90 bottom locked
C87 "Capacitor 0402 SMD" CAPC1005X55N 84.684,31.115 r90 bottom locked
C88 "Capacitor 0402 SMD" CAPC1005X55N 91.491,35.484 r180 bottom locked
C89 "Capacitor 0402 SMD" CAPC1005X55N 79.207,47.371 r270 bottom locked
C90 "Capacitor 0402 SMD" CAPC1005X55N 91.491,42.993 r180 bottom locked
C91 "*" 0603 83.541,43.485 r0 bottom locked
C92 "Capacitor 0402 SMD" CAPC1005X55N 84.709,47.371 r270 bottom locked
C93 "*" 0603 87.757,39.37 r90 bottom locked
C96 "Capacitor 0402 SMD" CAPC1005X55N 75.387,40.996 r0 bottom locked
C97 "Capacitor 0402 SMD" CAPC1005X55N 70.282,39.497 r180 bottom locked
C98 "Capacitor 0402 SMD" CAPC1005X55N 75.387,46.507 r0 bottom locked
C99 "Capacitor 0402 SMD" CAPC1005X55N 9.906,62.484 r90 top locked
C100 "Capacitor 0402 SMD" CAPC1005X55N 9.906,24.892 r90 top locked
C101 "*" CAPC1632X80USR 107.188,10.668 r270 top locked
C102 "*" CAPC1632X80USR 102.235,10.668 r270 top locked
C103 "*" CAPC1632X80USR 102.362,75.311 r90 top locked
C104 "*" CAPC1632X80USR 107.315,75.311 r90 top locked
C105 "Capacitor 1210 SMD" CAPC3225X220N 69.977,75.057 r90 top locked
C106 "Capacitor 1210 SMD" CAPC3225X220N 58.166,81.407 r0 top locked
C107 "Capacitor 1210 SMD" CAPC3225X220N 35.052,81.915 r0 top locked
C108 "Footprint ???" CAPC1632X80USR 24.765,28.448 r90 top locked
C109 "Capacitor 0402 SMD" CAPC1005X55N 23.368,26.101 r0 top locked
C110 "Capacitor 0402 SMD" CAPC1005X55N 17.653,28.448 r90 top locked
C111 "Capacitor 0402 SMD" CAPC1005X55N 90.195,47.295 r270 bottom locked
C112 "Capacitor 0402 SMD" CAPC1005X55N 90.17,31.115 r90 bottom locked
C113 "Capacitor 0402 SMD" CAPC1005X55N 75.387,37.49 r0 bottom locked
C114 "Capacitor 0402 SMD" CAPC1005X55N 75.387,43.485 r0 bottom locked
C115 "Capacitor 0402 SMD" CAPC1005X55N 75.387,44.983 r0 bottom locked
C116 "Footprint ???" CAPC1632X80USR 62.25,78.75 r0 top locked
F1 "FIDUCIALTOP_GLOBAL" FiducialTop_Global 8.55,3 r0 top locked
F2 "FIDUCIALTOP_GLOBAL" FiducialTop_Global 7.75,81.75 r0 top locked
F3 "FIDUCIALTOP_GLOBAL" FiducialTop_Global 77.5,82.25 r0 top locked
F6 "FIDUCIALBOT_GLOBAL" FiducialBot_Global 3.3,3.6 r0 top locked
F7 "FIDUCIALBOT_GLOBAL" FiducialBot_Global 89.725,3.1 r0 top locked
F8 "FIDUCIALBOT_GLOBAL" FiducialBot_Global 9.2,83.4 r0 top locked
H1 "Non-Plated" HOLE 106.68,81.026 r0 top locked
H2 "Non-Plated" HOLE 106.68,4.826 r0 top locked
H3 "Non-Plated" HOLE 15.24,4.826 r0 top locked
H4 "Non-Plated" HOLE 15.24,81.026 r0 top locked
J1 "Z-DOK" TYCO6367555 123.825,68 r90 top locked
J2 "Value" EDGE_LAUNCH_TH_SMA 0.762,58.674 r0 top locked
J4 "Value" EDGE_LAUNCH_TH_SMA 0.762,39.767 r0 top locked
J5 "Value" EDGE_LAUNCH_TH_SMA 0.762,21.082 r0 top locked
J6 "Value" EDGE_LAUNCH_TH_SMA 0.762,79.478 r0 top locked
JP1 "Jumper2W" JP-100MIL 99.187,82.931 r90 top locked
JP2 "Jumper2W" JUMPER 24.13,45.593 r0 top locked
JP3 "Jumper2W" JUMPER 24.13,7.874 r0 top locked
L1 "1200N" INDM2520X160N 37.465,59.014 r270 top locked
L2 "" INDM2520X160N 37.465,21.422 r270 top locked
L3 "TDK" INDC1608X80USR 108.966,13.335 r180 top locked
L4 "TDK" INDC1608X80USR 104.267,13.335 r180 top locked
L5 "TDK" INDC1608X80USR 104.394,72.644 r0 top locked
L6 "TDK" INDC1608X80USR 109.093,72.644 r0 top locked
L7 "" INDC1005X60N 34.798,20.172 r0 top locked
L8 "" INDC1005X60N 34.798,57.764 r0 top locked
LOGO1 "MEERKATLOGO" MEERKATLOGO 73.137,0.128 r0 top locked
P1 "SAMTEC-TSM-105-01-TM-SV-5W-HDR" TSM_5X1_SV 92.837,66.675 r0 top locked
R2 "*" RESC1005X40N 69.342,43.815 r45 top locked
R3 "3k3" RESC1005X40N 69.723,30.861 r0 top locked
R4 "DNP" RESC1005X40N 71.476,30.48 r90 bottom locked
R5 "0E" RESC1005X40N 74.981,19.533 r90 bottom locked
R6 "DNP" RESC1005X40N 77.216,19.456 r90 bottom locked
R7 "10k" RESC1005X40N 70.579,32.561 r90 top locked
R9 "1K" 0603 73.33,23.114 r90 top locked
R10 "1K" 0603 81.28,83.312 r0 top locked
R11 "1K" 0603 81.28,81.026 r0 top locked
R12 "1K" 0603 72.263,59.69 r270 top locked
R13 "1K" 0603 81.28,78.74 r0 top locked
R14 "1K" 0603 81.28,76.454 r0 top locked
R15 "220R" 0603 108.331,64.897 r270 top locked
R16 "220R" 0603 108.331,60.706 r90 top locked
R17 "*" RESC1005X40N 77.216,7.874 r0 top locked
R18 "50R" RESC1005X40N 77.216,10.414 r0 top locked
R19 "10k" 0603 13.97,54.483 r0 bottom locked
R20 "10k" 0603 13.97,17.145 r0 bottom locked
R21 "100R" RESC1005X40N 69.342,34.544 r315 top locked
R24 "470R" 0603 93.613,61.829 r180 top locked
R25 "470R" 0603 99.187,64.897 r90 top locked
R26 "10K" 0603 97.702,61.804 r180 top locked
R36 "50R" RESC1005X40N 10.287,39.767 r0 top locked
R37 "100R" RESC1005X40N 66.275,38.3 r270 top locked
R40 "3K3" 0603 76.073,65.532 r180 top locked
R41 "2K4" 0603 76.073,65.532 r180 bottom locked
R42 "3K3" 0603 24.384,77.089 r90 top locked
R43 "1K2" 0603 24.384,77.089 r90 bottom locked
R44 "10K" 0603 62.357,78.994 r270 bottom locked
R45 "3K3" 0603 48.768,75.311 r90 top locked
R46 "2K4" 0603 48.768,75.311 r90 bottom locked
R47 "*" RESC1005X40N 9.398,79.478 r0 top locked
R48 "1K" 0603 77.851,59.69 r90 top locked
R49 "1K" 0603 29.21,3.048 r0 top locked
R50 "*" 0603 96.774,78.105 r90 top locked
R51 "1K" 0603 73.33,19.177 r90 top locked
R52 "1K" 0603 75.565,59.69 r270 top locked
T1 "CX2156" PULSE_KAYAK 43.815,60.812 r270 top locked
T2 "CX2156" PULSE_KAYAK 43.815,20.172 r270 top locked
T3 "CX2156" PULSE_KAYAK 13.081,39.767 r270 top locked
U1 "TMP421AIDCNT" TI_SOT23-8 73.279,9.779 r90 top locked
U5 "TPS7440RGWT" QFN65P500X500X100-21AN 75.311,70.612 r180 top locked
U6 "TPS7440RGWT" QFN65P500X500X100-21AN 29.21,78.105 r90 top locked
U7 "TPS7440RGWT" QFN65P500X500X100-21AN 53.848,76.073 r90 top locked
U9 "AT24C02B" SOIC127P600X175-8N 92.456,80.01 r270 top locked
U10 "TPS7994DDCR" SOT95P280X110-5USR2 20.447,64.889 r0 top locked
U17 "SBB-2089Z" SIRENZA_SOT89 30.861,59.796 r0 top locked
U18 "SBB-2089Z" SIRENZA_SOT89 30.861,22.204 r0 top locked
U19 "ADC08D1520CIYB" NS_VNX128A 83.439,39.243 r270 top locked
U21 "SN74LVC2G07DBVR" SOT95P280X145-6N 73.914,55.245 r90 top locked
U22 "SN74LVC2G07DBVR" SOT95P280X145-6N 85.725,82.296 r180 top locked
U23 "SN74LVC2G07DBVR" SOT95P280X145-6N 29.337,6.223 r0 top locked
U24 "SN74LVC2G07DBVR" SOT95P280X145-6N 85.725,77.724 r180 top locked
U28 "PCA9306" SOP65P400X130-8USR 102.997,62.103 r180 top locked
U29 "SN65LVDS1DBVR" SOT95P280X145-5N 9.906,76.581 r90 top locked
U30 "PE4246" PSON95P300X300X90-7USR 11.176,59.624 r0 top locked
U31 "PE4246" PSON95P300X300X90-7USR 11.176,22.032 r0 top locked
U34 "PCA9555PWR" TI_TSSOP24 22.606,15.113 r270 bottom locked
U35 "PCA9555PWR" TI_TSSOP24 22.606,52.705 r270 bottom locked
U36 "TPS7994DDCR" SOT95P280X110-5USR 20.447,27.305 r0 top locked

## Footprints (in the part's own frame and the unit in brackets; to place one, negate y for a bottom-side part, rotate by r counter-clockwise, add the part's x,y. Pads: shape width x height; smd on the part's side, far side on the other; paste and mask are expansions set on the pad)
0603 [mil]
  rect 38x30 smd: 1(-31,0) 2(31,0)
  silkscreen extent -70,-35 70,35
3528 [mil]
  rect 75x90 smd: 1(67.5,0) 2(-67.5,0)
  silkscreen extent -125,-65 125,65
CAPC1005X55N [mm]
  rect 0.65x0.6 smd mask+0.05: 1(-0.45,0) 2(0.45,0)
CAPC1632X80USR [mm]
  rect 0.95x3.45 smd: 1(-0.8,0) 2(0.8,0)
CAPC3225X220N [mm]
  rect 1.35x2.7 smd mask+0.05: 1(-1.4,0) 2(1.4,0)
  silkscreen extent -0.3,-1.35 0.3,1.35
EDGE_LAUNCH_TH_SMA [mil]
  rect 60x16 smd: 1(0,0)
  round 60 hole 47.24: 2(39,48) 3(126,48) 4(39,-48) 5(126,-48)
  round 25 / inner round 60 / far side round 60 hole 9.84: 6(-4.5,-33) 7(82.5,-33) 8(175.5,-33) 9(-4.5,33) 10(82.5,33) 11(175.5,33)
  Top Layer region: -30,160 -30,18 188,18 188,160 -30,160
  Top Layer region: -30,-18 -30,-160 188,-160 188,-18 -30,-18
  Bottom Layer region: -30,160 -30,18 188,18 188,160 -30,160
  Bottom Layer region: -30,-18 -30,-160 188,-160 188,-18 -30,-18
FiducialBot_Global [mm] "1.5mm x 1.5mm"
  round 1.5 smd far side paste-2 mask+1: FiducialBot_Global(0,0)
FiducialTop_Global [mm] "1.5mm x 1.5mm"
  round 1.5 smd paste-2 mask+1: FiducialTop_Global(0,0)
HOLE [mm]
  round 6.35 hole 3.8: 1(0,0)
INDC1005X60N [mm]
  rect 0.6x0.7 smd: 1(-0.5,0) 2(0.5,0)
INDC1608X80USR [mm]
  rect 0.9x1 smd: 1(-0.8,0) 2(0.8,0)
INDM2520X160N [mm]
  rect 1.2x1.3 smd: 1(-1.25,0) 2(1.25,0)
  silkscreen extent 0,-1 0,1
JP-100MIL [mil]
  round 60 hole 35.43: 1(0,50) 2(0,-50)
  silkscreen extent -50,-100 90,100
JUMPER [mm]
  rect 0.7x0.8 smd paste+0.05 mask+0.05: 1(-0.8,0) 2(0.8,0)
  silkscreen extent -0.2,-0.6 0.2,0.6
MEERKATLOGO [mm]
  silkscreen extent 0.15,-0.05 20.15,12.4
MINICIRCUITS_MMM168 [mil]
  rect 35x51 smd: 1(0,0) 2(0,-87) 4(-75,0)
  rect 47x51 smd: 3(-67,-87)
NS_VNX128A [mm]
  oval 0.3x1.6 smd: 1(-7.75,-10.6) 2(-7.25,-10.6) 3(-6.75,-10.6) 4(-6.25,-10.6) 5(-5.75,-10.6) 6(-5.25,-10.6) 7(-4.75,-10.6) 8(-4.25,-10.6) 9(-3.75,-10.6) 10(-3.25,-10.6) 11(-2.75,-10.6) 12(-2.25,-10.6) 13(-1.75,-10.6) 14(-1.25,-10.6) 15(-0.75,-10.6) 16(-0.25,-10.6) 17(0.25,-10.6) 18(0.75,-10.6) 19(1.25,-10.6) 20(1.75,-10.6) 21(2.25,-10.6) 22(2.75,-10.6) 23(3.25,-10.6) 24(3.75,-10.6) 25(4.25,-10.6) 26(4.75,-10.6) 27(5.25,-10.6) 28(5.75,-10.6) 29(6.25,-10.6) 30(6.75,-10.6) 31(7.25,-10.6) 32(7.75,-10.6) 65(7.75,10.6) 66(7.25,10.6) 67(6.75,10.6) 68(6.25,10.6) 69(5.75,10.6) 70(5.25,10.6) 71(4.75,10.6) 72(4.25,10.6) 73(3.75,10.6) 74(3.25,10.6) 75(2.75,10.6) 76(2.25,10.6) 77(1.75,10.6) 78(1.25,10.6) 79(0.75,10.6) 80(0.25,10.6) 81(-0.25,10.6) 82(-0.75,10.6) 83(-1.25,10.6) 84(-1.75,10.6) 85(-2.25,10.6) 86(-2.75,10.6) 87(-3.25,10.6) 88(-3.75,10.6) 89(-4.25,10.6) 90(-4.75,10.6) 91(-5.25,10.6) 92(-5.75,10.6) 93(-6.25,10.6) 94(-6.75,10.6) 95(-7.25,10.6) 96(-7.75,10.6)
  oval 1.6x0.3 smd: 33(10.6,-7.75) 34(10.6,-7.25) 35(10.6,-6.75) 36(10.6,-6.25) 37(10.6,-5.75) 38(10.6,-5.25) 39(10.6,-4.75) 40(10.6,-4.25) 41(10.6,-3.75) 42(10.6,-3.25) 43(10.6,-2.75) 44(10.6,-2.25) 45(10.6,-1.75) 46(10.6,-1.25) 47(10.6,-0.75) 48(10.6,-0.25) 49(10.6,0.25) 50(10.6,0.75) 51(10.6,1.25) 52(10.6,1.75) 53(10.6,2.25) 54(10.6,2.75) 55(10.6,3.25) 56(10.6,3.75) 57(10.6,4.25) 58(10.6,4.75) 59(10.6,5.25) 60(10.6,5.75) 61(10.6,6.25) 62(10.6,6.75) 63(10.6,7.25) 64(10.6,7.75) 97(-10.6,7.75) 98(-10.6,7.25) 99(-10.6,6.75) 100(-10.6,6.25) 101(-10.6,5.75) 102(-10.6,5.25) 103(-10.6,4.75) 104(-10.6,4.25) 105(-10.6,3.75) 106(-10.6,3.25) 107(-10.6,2.75) 108(-10.6,2.25) 109(-10.6,1.75) 110(-10.6,1.25) 111(-10.6,0.75) 112(-10.6,0.25) 113(-10.6,-0.25) 114(-10.6,-0.75) 115(-10.6,-1.25) 116(-10.6,-1.75) 117(-10.6,-2.25) 118(-10.6,-2.75) 119(-10.6,-3.25) 120(-10.6,-3.75) 121(-10.6,-4.25) 122(-10.6,-4.75) 123(-10.6,-5.25) 124(-10.6,-5.75) 125(-10.6,-6.25) 126(-10.6,-6.75) 127(-10.6,-7.25) 128(-10.6,-7.75)
  rect 5x5 smd: 129(0,0)
  silkscreen extent -8.89,-8.89 8.89,8.89
PSON95P300X300X90-7USR [mm]
  rect 0.5x0.45 smd: 1(-1.3,0.95) 2(-1.3,0) 3(-1.3,-0.95) 4(1.3,-0.95) 5(1.3,0) 6(1.3,0.95)
  rect 1.25x2.05 smd: 7(0,0)
  silkscreen extent -2.17,-1.5 0.7,1.5
PULSE_KAYAK [mm]
  rect 1x1.55 smd: 1(0,0) 2(1.524,0) 3(3.048,0) 4(3.048,4.318) 6(0,4.318)
  silkscreen extent -1.27,-1.52 4.32,5.84
QFN50P400X400X100-25USR [mm]
  rect 0.7x0.3 smd: 1(-2.05,1.25) 2(-2.05,0.75) 3(-2.05,0.25) 4(-2.05,-0.25) 5(-2.05,-0.75) 6(-2.05,-1.25) 13(2.05,-1.25) 14(2.05,-0.75) 15(2.05,-0.25) 16(2.05,0.25) 17(2.05,0.75) 18(2.05,1.25)
  rect 0.3x0.7 smd: 7(-1.25,-2.05) 8(-0.75,-2.05) 9(-0.25,-2.05) 10(0.25,-2.05) 11(0.75,-2.05) 12(1.25,-2.05) 19(1.25,2.05) 20(0.75,2.05) 21(0.25,2.05) 22(-0.25,2.05) 23(-0.75,2.05) 24(-1.25,2.05)
  rect 2.95x2.95 smd: 25(0,0)
  silkscreen extent -2.97,-2 2,2
QFN65P500X500X100-21AN [mm]
  rect 1.05x0.35 smd: 1(-2.35,1.3) 2(-2.35,0.65) 3(-2.35,0) 4(-2.35,-0.65) 5(-2.35,-1.3) 11(2.35,-1.3) 12(2.35,-0.65) 13(2.35,0) 14(2.35,0.65) 15(2.35,1.3)
  rect 0.35x1.05 smd: 6(-1.3,-2.35) 7(-0.65,-2.35) 8(0,-2.35) 9(0.65,-2.35) 10(1.3,-2.35) 16(1.3,2.35) 17(0.65,2.35) 18(0,2.35) 19(-0.65,2.35) 20(-1.3,2.35)
  rect 3.25x3.25 smd: 21(0,0)
  silkscreen extent -3.22,1.93 -2.98,2.17
RESC1005X40N [mm]
  rect 0.6x0.6 smd mask+0.05: 1(-0.45,0) 2(0.45,0)
SIRENZA_SOT89 [mil]
  rect 34x50 smd: 1(-59,-80) 2(0,-80) 3(59,-80)
  rect 98.43x98.43 smd: 4(0,40)
  silkscreen extent -100,-60 100,70
SOIC127P600X175-8N [mm]
  rect 1.55x0.6 smd mask+0.05: 1(-2.7,1.905) 2(-2.7,0.635) 3(-2.7,-0.635) 4(-2.7,-1.905) 5(2.7,-1.905) 6(2.7,-0.635) 7(2.7,0.635) 8(2.7,1.905)
  silkscreen extent -3.32,-2.5 1.55,2.88
SOP65P400X130-8USR [mm]
  rect 1.15x0.4 smd: 1(-1.9,0.975) 2(-1.9,0.325) 3(-1.9,-0.325) 4(-1.9,-0.975) 5(1.9,-0.975) 6(1.9,-0.325) 7(1.9,0.325) 8(1.9,0.975)
  silkscreen extent -2.33,-1.5 1,1.82
SOT95P280X110-5USR [mm]
  rect 1.15x0.6 smd: 1(-1.554,0.696) 2(-1.554,-0.254) 3(-1.554,-1.204) 4(1.046,-1.204) 5(1.046,0.696)
  silkscreen extent -1.47,-1.7 0.15,2.13
SOT95P280X110-5USR2 [mm]
  rect 1.15x0.6 smd: 1(-1.554,0.696) 2(-1.554,-0.254) 3(-1.554,-1.204) 4(1.046,-1.204) 5(1.046,0.696)
  silkscreen extent -1.47,-1.7 0.15,2.13
SOT95P280X145-5N [mm]
  rect 1.1x0.6 smd: 1(-1.3,0.95) 2(-1.3,0) 3(-1.3,-0.95) 4(1.3,-0.95) 5(1.3,0.95)
  silkscreen extent -1.72,-1.5 0.35,1.92
SOT95P280X145-6N [mm]
  rect 1.05x0.6 smd: 1(-1.35,0.95) 2(-1.35,0) 3(-1.35,-0.95) 4(1.35,-0.95) 5(1.35,0) 6(1.35,0.95)
  silkscreen extent -1.72,1.67 -1.48,1.92
TI_SOT23-8 [mm]
  oval 0.4x1.2 smd: 1(-0.975,-1) 2(-0.325,-1) 3(0.325,-1) 4(0.975,-1) 5(0.975,1) 6(0.325,1) 7(-0.325,1) 8(-0.975,1)
  silkscreen extent -2.03,-1.27 1.61,0.27
TI_TSSOP24 [mil]
  oval 65x13 smd: 1(-105,137.5) 2(-105,112.5) 3(-105,87.5) 4(-105,62.5) 5(-105,37.5) 6(-105,12.5) 7(-105,-12.5) 8(-105,-37.5) 9(-105,-62.5) 10(-105,-87.5) 11(-105,-112.5) 12(-105,-137.5) 13(105,-137.5) 14(105,-112.5) 15(105,-87.5) 16(105,-62.5) 17(105,-37.5) 18(105,-12.5) 19(105,12.5) 20(105,37.5) 21(105,62.5) 22(105,87.5) 23(105,112.5) 24(105,137.5)
  silkscreen extent -48,-150 48,150
TSM_5X1_SV [mil]
  rect 50x135 smd mask+2: 1(50,-57.5) 2(-50,57.5) 3(-150,-57.5) 4(-250,57.5) 5(-350,-57.5)
  silkscreen extent 100,-104 114,-90
TYCO6367555 [mm]
  round 1.05 hole 0.6: A1(0,0) A2(-2.03,0) A3(-5.08,0) A4(-7.11,0) A5(-10.16,0) A6(-12.19,0) A7(-15.24,0) A8(-17.27,0) A9(-20.32,0) A10(-22.35,0) A11(-25.4,0) A12(-27.43,0) A13(-30.48,0) A14(-32.51,0) A15(-35.56,0) A16(-37.59,0) A17(-40.64,0) A18(-42.67,0) A19(-45.72,0) A20(-47.75,0) B1(-1.01,1.75) B2(-3.55,1.75) B3(-6.09,1.75) B4(-8.63,1.75) B5(-11.17,1.75) B6(-13.71,1.75) B7(-16.25,1.75) B8(-18.79,1.75) B9(-21.33,1.75) B10(-23.87,1.75) B11(-26.41,1.75) B12(-28.95,1.75) B13(-31.49,1.75) B14(-34.03,1.75) B15(-36.57,1.75) B16(-39.11,1.75) B17(-41.65,1.75) B18(-44.19,1.75) B19(-46.73,1.75) B20(-49.27,1.75) C1(-2.54,3.5) C2(-4.57,3.5) C3(-7.62,3.5) C4(-9.65,3.5) C5(-12.7,3.5) C6(-14.73,3.5) C7(-17.78,3.5) C8(-19.81,3.5) C9(-22.86,3.5) C10(-24.89,3.5) C11(-27.94,3.5) C12(-29.97,3.5) C13(-33.02,3.5) C14(-35.05,3.5) C15(-38.1,3.5) C16(-40.13,3.5) C17(-43.18,3.5) C18(-45.21,3.5) C19(-48.26,3.5) C20(-50.29,3.5) D1(0,6) D2(-2.03,6) D3(-5.08,6) D4(-7.11,6) D5(-10.16,6) D6(-12.19,6) D7(-15.24,6) D8(-17.27,6) D9(-20.32,6) D10(-22.35,6) D11(-25.4,6) D12(-27.43,6) D13(-30.48,6) D14(-32.51,6) D15(-35.56,6) D16(-37.59,6) D17(-40.64,6) D18(-42.67,6) D19(-45.72,6) D20(-47.75,6) E1(-1.01,7.75) E2(-3.55,7.75) E3(-6.09,7.75) E4(-8.63,7.75) E5(-11.17,7.75) E6(-13.71,7.75) E7(-16.25,7.75) E8(-18.79,7.75) E9(-21.33,7.75) E10(-23.87,7.75) E11(-26.41,7.75) E12(-28.95,7.75) E13(-31.49,7.75) E14(-34.03,7.75) E15(-36.57,7.75) E16(-39.11,7.75) E17(-41.65,7.75) E18(-44.19,7.75) E19(-46.73,7.75) E20(-49.27,7.75) F1(-2.54,9.5) F2(-4.57,9.5) F3(-7.62,9.5) F4(-9.65,9.5) F5(-12.7,9.5) F6(-14.73,9.5) F7(-17.78,9.5) F8(-19.81,9.5) F9(-22.86,9.5) F10(-24.89,9.5) F11(-27.94,9.5) F12(-29.97,9.5) F13(-33.02,9.5) F14(-35.05,9.5) F15(-38.1,9.5) F16(-40.13,9.5) F17(-43.18,9.5) F18(-45.21,9.5) F19(-48.26,9.5) F20(-50.29,9.5) W1(-61.295,2.86) W2(-58.195,2.86) W3(-55.095,2.86) W4(4.805,2.86) W5(7.905,2.86) W6(11.005,2.86) X1(-61.295,4.86) X2(-58.195,4.86) X3(-55.095,4.86) X4(4.805,4.86) X5(7.905,4.86) X6(11.005,4.86) Y1(-61.295,6.86) Y2(-58.195,6.86) Y3(-55.095,6.86) Y4(4.805,6.86) Y5(7.905,6.86) Y6(11.005,6.86) Z1(-61.295,8.86) Z2(-58.195,8.86) Z3(-55.095,8.86) Z4(4.805,8.86) Z5(7.905,8.86) Z6(11.005,8.86)
  silkscreen extent -65.36,-3.2 14.36,12

## Part data
AT11 AT21: library part LAT-0+, "Fixed Attenuator"
AT12 AT22: "Broadband 6-bit IC Digital Attenuator"
C1 C2 C3 C5 C8 C9 C10 C11 C14 C15 C16 C17 C18 C19 C20 C21 C22 C23 C26 C27 C33 C36 C38 C39 C58 C59 C60 C61 C63 C64 C65 C66 C67 C68 C70 C71 C72 C73 C75 C79 C80 C81 C82 C84 C91 C93 C101 C102 C103 C104 C108 C116: library part CAP-0603, "CAP SMD 0603"
C4 C6 C7: library part CAPACITOR-POLARISED, "CAPACITOR-POLARISED"
C12 C13 C24 C25 C28 C29 C30 C31 C32 C34 C35 C37 C55 C56 C62 C69 C74 C76 C78 C83 C85 C86 C87 C88 C89 C90 C92 C96 C97 C98 C99 C100 C109 C110 C111 C112 C113 C114 C115: library part cap0402
C105 C106 C107: library part cap1210
H1 H2 H3 H4: library part "Unplated Hole_3.2mm", "PCB Mounting Hole"
J1: library part "ZDOK 6367555"
J2 J4 J5 J6: library part 142-0761-811, "High Frequency SMA End Lauch Connector"
JP1 JP2 JP3: "Jumper Wire"
L1 L2 L7 L8: library part CHOKE, "CHOKE"
L3 L4 L5 L6: library part MPZ16085221A, "POWER LINE"
R2 R3 R4 R5 R6 R7 R9 R10 R11 R12 R13 R14 R15 R16 R17 R18 R19 R20 R21 R24 R25 R26 R36 R37 R40 R41 R42 R43 R44 R45 R46 R47 R48 R49 R50 R51 R52: library part RES-0805, "RESISTOR SMD 0805"
T1 T2 T3: "TRANSFORMER WIDEBAND RF APPLICATION"
U1: "Remote and Local TempreatureSensor in SOT23-8"
U5 U6 U7: library part TPS74401RGWT, "3.0A Ultra-LDO with Programmable Soft-Start"
U9: "Two wire Serial EEPROM 2K (256 x 8)"
U10 U36: "Low Quiescent Current, Ultra-Low Noise Dropout Linear Regulator"
U17 U18: "High performance InaGaP HBT MMIC amplfier"
U19: "Low Power, 8-Bit, Dual 1.5 GSPS or Single 3.0 GSPS A/D Converter"
U21 U22 U23 U24: "Dual Buffer/Driver with open-drain output"
U28: library part PCA9306DCTR, "Dual Bidirectional I2C Bus and SMBus Voltage-Level Translator"
U29: "High Speed Differential Line Driver/Receiver"
U30 U31: "Absorptive SPST UltraCMOS RF Switch"
U34 U35: "Remote 16-Bit I2C and SMBus  I/O expander"

## Free pads (board coordinates)
  round 1 smd far side paste-2 mask+0.75: 0(17,58.75) 1(18,20.25) 1(28.25,46.5) 1(29.5,12.75)
  round 1 smd paste-2 mask+0.75: FIDLOC1(15,52.5) FIDLOC1(16,15) FIDLOC1(27,84) FIDLOC1(40,75) FIDLOC1(45,27.75) FIDLOC1(45,65.75) FIDLOC1(66.75,80.5) FIDLOC1(72.5,28) FIDLOC1(81,65.75) FIDLOC1(93.75,49.5)

## Via types
v1: diameter 0.55, hole 0.25, Top Layer to Bottom Layer, tented both sides, 1066 vias
v2: diameter 3.302, hole 2.2, Top Layer to Bottom Layer, tented both sides, 18 vias
v3: diameter 0.65, hole 0.25, Top Layer to Bottom Layer, tented both sides, 4 vias
v4: diameter 0.51, hole 0.25, Top Layer to Bottom Layer, tented both sides, 1 vias
v5: diameter 0.55, hole 0.25, Top Layer to Bottom Layer, 1 vias

## Nets (pads, with @x,y where several pads share a name; then routed paths per layer and width w, separated by ;. In a path a pad name is that pad's centre, name@x,y a point inside that pad or via, vN(x,y) a via of type N, cw(c..) or ccw(c..) an arc to the next point about the centre after c; other vN are vias at no path point)
2V5_FILT: C104.1 L5.2 L6.1
2V5_IN: J1.W4 J1.X4 J1.Y4 J1.Z4 L6.2
4V2_I: C1.1 C26.1 C27.1 C39.1 L1.1 U10.5
4V2_Q: C2.1 C71.1 C72.1 C108.1 L2.1 U36.5
5V_FILT: C101.1 L3.2 L4.1
5V_IN: J1.W2 J1.X2 J1.Y2 J1.Z2 L3.1
+1V9: C7.1 C9.2 C10.2 C11.2 C74.1 C76.1 C78.1 C84.1 C85.1 C96.1 C97.1 C98.1 C113.1 C114.1 C115.1 R4.1 R45.1 U7.1 U7.18 U7.19 U7.20 U19.2 U19.5 U19.8 U19.13 U19.16 U19.17 U19.20 U19.25 U19.28 U19.33 U19.128 | length 72.8
  Top Layer w0.3: U19.16@72.189,39.493 v1@71.603,39.493 ; U19.28@73.489,33.493 v1@74.219,33.493 ; U19.25@73.489,34.993 v1@74.244,34.993 ; U19.20@73.489,37.493 v1(74.117,37.493) ; U19.17@73.489,38.993 v1@74.066,38.993 ; U19.13@73.489,40.993 v1@74.116,40.993 ; U19.8@73.489,43.493 v1@74.117,43.493 ; U19.5@73.489,44.993 v1@74.117,44.993 ; U19.2@73.489,46.493 v1@74.117,46.493 ; v1(75.04,49.911) v1@75.108,49.843 ; U19.33@75.689,29.293 v1@75.689,29.87 ; v1@71.603,39.493 U19.16@72.839,39.493 v1(71.603,39.497) v1@71.603,39.493 ; v1@74.066,38.993 U19.17@72.839,38.993 v1(74.066,38.989) v1@74.066,38.993 ; v1(74.117,37.493) U19.20@72.839,37.493 v1(74.117,37.493) ; v1@74.116,40.993 U19.13@72.839,40.993 v1(74.116,40.997) v1@74.116,40.993 ; v1@74.117,43.493 U19.8@72.839,43.493 v1(74.117,43.47) v1@74.117,43.493 ; v1@74.117,44.993 U19.5@72.839,44.993 v1(74.117,45.075) v1@74.117,44.993 ; v1@74.117,46.493 U19.2@72.839,46.493 v1(74.117,46.482) v1@74.117,46.493 ; v1@74.219,33.493 U19.28@72.839,33.493 v1(74.219,33.503) v1@74.219,33.493 ; v1@74.244,34.993 U19.25@72.839,34.993 v1(74.244,35.027) v1@74.244,34.993 ; v1@75.108,49.843 U19.128@75.689,49.843 v1@75.108,49.843 ; v1@75.689,29.87 v1(75.692,29.87) U19.33@75.689,28.643 v1@75.689,29.87
  Top Layer w0.305: v1(50.292,76.327) 50.546,76.073 ; v1(50.451,74.198) 50.624,74.773 ; U7.20@51.148,74.773 50.624,74.773 ; U7.19@51.148,75.423 v1(50.495,75.423) U7.19@51.498,75.423 ; U7.18@51.148,76.073 50.546,76.073 ; U7.20@51.498,74.773 50.624,74.773 ; U7.18@51.498,76.073 50.546,76.073 ; v1(51.943,73.445) 52.221,73.723 U7.1@52.548,73.723
  Top Layer w0.508: v1(42.088,78.257) v1@42.113,78.257 ; C7.1@45.212,75.755 v1(45.212,74.325) ; C7.1@45.889,75.585 v1(45.212,74.325) ; R45.1@48.768,74.422 v1(48.768,73.563) R45.1@48.768,74.524 ; v1(45.212,74.325) 44.535,75.585 v1(45.212,74.325)
  Bottom Layer w0.508: C10.2@42.088,77.318 v1(42.088,78.257) C10.2@42.088,77.419 ; v1(70.698,30.03) R4.1@71.476,30.03 ; C97.1@70.732,39.497 v1(71.603,39.497) C97.1@70.757,39.497 ; v1(74.117,46.482) v1@74.143,46.507 ; C76.1@74.237,49.911 v1(75.04,49.911) C76.1@74.262,49.911 ; C74.1@74.912,33.477 v1(74.219,33.503) 74.937,33.503 C74.1@74.937,33.477 ; C78.1@74.912,35.001 v1(74.244,35.027) 74.937,35.027 C78.1@74.937,35.001 ; C113.1@74.912,37.49 v1(74.117,37.493) 74.935,37.493 C113.1@74.937,37.49 ; C85.1@74.912,38.989 v1(74.066,38.989) C85.1@74.937,38.989 ; C96.1@74.912,40.996 v1(74.116,40.997) C96.1@74.937,40.996 ; C114.1@74.912,43.485 v1(74.117,43.47) 74.937,43.47 C114.1@74.937,43.485 ; C115.1@74.912,44.983 v1(74.117,45.075) 74.866,45.029 74.937,45.029 C115.1@74.937,44.983 ; C98.1@74.912,46.507 v1@74.143,46.507 ; C98.1@74.937,46.507 v1@74.143,46.507 ; C84.1@75.692,30.64 v1(75.692,29.87) C84.1@75.692,30.665 ; v1(73.32,29.415) C11.2@73.32,28.455 v1(73.32,29.415) ; v1(73.32,29.415) 73.32,28.557 v1(73.32,29.415) ; v1(69.685,48.638) C9.2@70.543,48.638 v1(69.685,48.638)
+1V9D: C4.1 C29.2 C86.1 C87.1 C88.1 C89.1 C90.1 C91.1 C92.1 C93.1 C111.1 C112.1 R9.1 R10.1 R11.1 R13.1 R14.1 R40.1 R51.1 U5.1 U5.18 U5.19 U5.20 U19.40 U19.51 U19.62 U19.73 U19.88 U19.99 U19.110 U19.121 U21.5 | length 89.1
  Top Layer w0.152: v1@75.763,66.603 75.961,67.932 v1@76.159,66.603 ; U5.19@75.863,67.904 75.961,67.28 ; v1(75.961,66.588) U5.19@75.961,68.262 ; U5.19@75.961,67.912 75.961,67.28 ; U5.19@76.059,67.904 75.961,67.28 ; U19.99@90.189,49.843 U19.99@90.195,49.843 ; U19.73@94.039,35.493 U19.73@94.039,35.558
  Top Layer w0.3: U19.40@79.189,29.293 v1@79.189,29.87 ; U19.121@79.189,49.193 v1@79.189,48.598 ; U19.51@84.689,29.293 v1@84.689,29.87 ; U19.110@84.689,49.193 v1(84.689,48.59) U19.110@84.689,49.843 ; U19.62@90.189,29.293 v1@90.189,29.87 ; U19.99@90.189,49.193 v1@90.189,48.565 ; U19.73@93.389,35.493 v1(92.786,35.493) U19.73@94.039,35.493 ; U19.88@93.389,42.993 v1(92.812,43.002) 94.031,43.002 94.031,42.993 U19.88@94.039,42.993 ; v1@79.189,29.87 U19.40@79.189,28.643 v1(79.197,29.87) v1@79.189,29.87 ; v1@79.189,48.598 U19.121@79.189,49.843 v1(79.197,48.59) v1@79.189,48.598 ; v1@84.689,29.87 v1(84.709,29.87) U19.51@84.689,28.643 v1@84.689,29.87 ; v1@90.189,29.87 U19.62@90.189,28.643 v1(90.195,29.87) v1@90.189,29.87 ; v1@90.189,48.565 U19.99@90.189,49.843 v1(90.17,48.565) v1@90.189,48.565
  Top Layer w0.305: U5.18@75.311,67.912 v1(75.311,67.259) U5.18@75.311,68.262 ; U5.20@76.611,67.912 v1(76.611,67.259) U5.20@76.611,68.262 ; U5.1@77.661,69.312 v1(78.664,69.312) U5.1@78.011,69.312
  Top Layer w0.508: R51.1@73.33,18.288 v1(73.33,17.45) R51.1@73.33,18.39 ; U21.5@73.914,56.82 v1@73.914,57.598 ; R40.1@76.86,65.532 v1(77.821,65.532) R40.1@76.962,65.532 ; v1@79.55,78.675 79.532,78.657 v1(79.532,76.454) ; C4.1@80.349,68.727 v1(81.026,67.467) ; R14.1@80.391,76.454 v1(79.532,76.454) ; R13.1@80.391,78.74 v1(79.532,78.74) R13.1@80.493,78.74 ; R11.1@80.391,81.026 v1(79.532,81.026) R11.1@80.493,81.026 ; R10.1@80.391,83.312 v1(79.532,83.312) R10.1@80.493,83.312 ; R14.1@80.493,76.454 v1(79.532,76.454) ; C4.1@81.026,68.897 v1(81.026,67.467) ; C4.1@81.703,68.727 v1(81.026,67.467) ; v1(73.304,21.184) v1@73.33,21.184 ; v1(73.304,21.184) R9.1@73.33,22.327 v1@73.33,21.184 ; v1(73.304,21.184) 73.33,22.225 v1@73.33,21.184 ; v1@73.914,57.598 U21.5@73.914,56.595 v1(73.873,57.598) v1@73.914,57.598
  Bottom Layer w0.3: v1@92.786,35.484 v1(92.786,35.493) ; v1@92.795,43.002 v1(92.812,43.002)
  Bottom Layer w0.508: v1@78.675,69.325 79.532,70.182 v1(79.532,76.454) ; C86.1@79.197,30.64 v1(79.197,29.87) C86.1@79.197,30.665 ; C89.1@79.207,47.821 v1(79.197,48.59) C89.1@79.207,47.846 ; v1@79.525,81 79.532,80.993 v1(79.532,78.74) ; v1@79.532,81.032 v1(79.532,83.312) ; C91.1@82.652,43.485 v1(81.793,43.485) C91.1@82.753,43.485 ; C87.1@84.684,30.64 v1(84.709,29.87) 84.709,30.563 C87.1@84.684,30.665 ; v1(84.689,48.59) v1@84.709,48.57 ; C92.1@84.709,47.821 v1@84.709,48.57 ; C92.1@84.709,47.846 v1@84.709,48.57 ; C93.1@87.757,38.481 v1(87.757,37.622) C93.1@87.757,38.583 ; C112.1@90.17,30.64 v1(90.195,29.87) 90.195,30.64 C112.1@90.17,30.665 ; v1(90.17,48.565) v1@90.195,48.539 ; C111.1@90.195,47.745 v1@90.195,48.539 ; C111.1@90.195,47.77 v1@90.195,48.539 ; C88.1@91.941,35.484 92.786,35.484 C88.1@91.966,35.484 ; C90.1@91.941,42.993 v1@92.786,42.993 ; C90.1@91.966,42.993 v1@92.786,42.993 ; v1@92.795,43.002 v1@92.786,42.993 ; v1(73.025,55.311) 73.025,55.558 73.162,55.695 ; v1(73.025,55.311) C29.2@73.914,55.695 ; v1(73.025,55.311) C29.2@73.914,55.695 ; 73.162,55.695 C29.2@73.914,55.695 ; 73.162,55.695 C29.2@73.914,55.695
+2V5: C3.1 C8.1 C28.2 C30.2 C38.2 C103.1 C105.2 C106.2 L5.1 R15.1 R16.1 U5.5 U5.6 U5.7 U5.8 U7.5 U7.6 U7.7 U7.8 U7.11 U22.5 U24.5 U28.2 | length 74.1
  Top Layer w0.3: v1@55.1,79.35 55.148,79.302 U7.11@55.148,78.423 ; U5.5@77.661,71.912 78.588,71.912 v1@78.625,71.875
  Top Layer w0.305: U7.6@56.198,74.773 U7.6@56.198,74.757 ; U7.8@56.198,76.073 56.198,76.095 v1@57.201,76.095 ; U7.8@56.548,76.073 v1@57.201,76.095 ; v1(57.201,76.241) v1@57.201,76.095 ; U5.7@75.961,72.962 75.946,72.962 v1(75.946,73.914) U5.7@75.961,73.312 ; U5.6@76.611,72.962 76.611,73.639 ; U7.6@56.198,74.757 v1@57.201,74.757 ; U7.6@56.198,74.757 v1(57.201,74.635) ; v1(57.201,74.635) v1@57.201,74.757 ; v1(57.201,74.635) 56.548,74.773 v1@57.201,74.757 ; v1(75.057,73.914) U5.8@75.311,72.962 75.311,73.66 ; v1(75.057,73.914) 75.311,73.312 75.311,73.66 ; v1(75.057,73.914) 75.311,73.66 ; U5.6@76.611,73.312 v1(77.089,73.914) ; U5.6@76.611,73.312 76.611,73.639 ; U5.6@76.611,73.312 76.611,73.639 ; U5.6@76.611,73.312 v1@76.886,73.914 ; 76.611,73.639 v1(77.089,73.914) ; 76.611,73.639 v1@76.886,73.914 ; v1@76.886,73.914 v1(77.089,73.914)
  Top Layer w0.35: v1@57.277,75.423 U7.7@56.198,75.423 v1(57.277,75.438) ; v1@57.277,75.423 v1(57.277,75.438) ; v1@57.277,75.423 56.548,75.423 v1(57.277,75.438) ; U7.5@55.148,73.406 v1(55.88,73.406) U7.5@55.148,73.723 U7.5@55.148,73.406
  Top Layer w0.4: v1(106.578,61.773) v1@106.578,61.778 ; v1(106.578,61.773) U28.2@104.897,61.778 v1@106.578,61.778 ; v1(106.578,61.773) 105.272,61.778 v1@106.578,61.778
  Top Layer w0.508: C106.2@59.566,81.407 v1(60.719,81.407) ; C106.2@59.643,80.993 v1(60.719,81.407) ; C106.2@59.643,81.821 v1(60.719,81.407) ; C105.2@69.563,76.534 v1(69.977,77.61) ; C105.2@69.977,76.457 v1(69.977,77.61) ; C105.2@70.391,76.534 v1(69.977,77.61) ; C3.1@75.057,74.892 v1(75.057,73.914) C3.1@76.2,74.892 ; C3.1@75.946,74.892 v1(75.946,73.914) C3.1@76.2,74.892 ; C3.1@77.089,74.892 v1(77.089,73.914) ; U24.5@84.15,77.724 v1(83.372,77.724) U24.5@84.375,77.724 ; U22.5@84.15,82.296 v1(83.372,82.296) U22.5@84.375,82.296 ; C8.1@58.255,75.311 58.255,74.635 v1(57.201,74.635) C8.1@58.255,75.311 ; C8.1@58.255,75.311 C8.1@58.255,75.438 ; C8.1@58.255,75.311 v1(57.201,76.241) 58.255,76.241 C8.1@58.255,75.438 ; C8.1@58.255,75.311 v1(57.277,75.438) C8.1@58.255,75.438 ; C3.1@76.2,74.892 v1(77.089,73.914) ; C3.1@76.2,74.892 v1(77.089,73.914) ; v1(104.745,65.532) C38.2@103.447,65.532 v1(104.745,65.532) ; v1(104.745,65.532) 103.472,65.532 v1(104.745,65.532) ; v1(107.315,65.659) v1@107.34,65.684 ; v1(107.315,65.659) R15.1@108.331,65.684 ; v1(107.315,65.659) R15.1@108.331,65.684 ; v1@107.34,65.684 R15.1@108.331,65.684 ; v1@107.34,65.684 R15.1@108.331,65.684 ; R16.1@108.331,59.919 108.356,59.944 v1(109.347,59.944) ; R16.1@108.331,59.919 v1(109.347,59.944) ; R16.1@108.331,59.919 v1(109.347,59.944)
  Bottom Layer w0.508: v1@83.426,82.296 85.25,82.296 v1(83.372,82.296) C28.2@85.275,82.296 ; v1(85.725,76.581) 85.656,76.581 85.275,76.962 ; 85.275,76.962 C30.2@85.275,77.724 85.275,76.962
  other v1: 97.836,71.293 99.273,71.293 100.71,71.293 102.147,71.293 103.584,71.293 78.613,71.882 98.555,72.012 99.992,72.012 101.428,72.012 97.836,72.73 99.273,72.73 100.71,72.73 102.147,72.73 98.555,73.449 99.992,73.449 101.428,73.449 97.836,74.167 99.273,74.167 55.118,79.375
+3V: AT12.18 AT22.18 C6.1 C16.1 C31.2 C34.1 C35.1 C60.1 C79.2 C99.1 C100.1 JP2.1 JP3.1 R19.1 R20.1 R42.1 U6.1 U6.18 U6.19 U6.20 U23.5 U29.1 U30.1 U31.1 U34.21 U34.24 U35.24 | length 87.7
  Top Layer w0.3: AT22.18@24.529,22.672 24.529,23.206 25.309,23.985 ; AT12.18@24.529,60.264 24.529,60.833 24.765,61.069 24.765,61.087 25.273,61.595 ; C60.1@25.985,24.254 25.309,23.985 ; C60.1@26.012,23.799 25.309,23.985 ; C16.1@26.125,61.849 25.273,61.595 ; C16.1@26.139,61.391 25.273,61.595 ; 25.273,61.595 26.137,61.595 C16.1@26.162,61.62 25.273,61.595 ; 25.309,23.985 25.992,23.985 C60.1@26.035,24.028 25.309,23.985
  Top Layer w0.305: v1(25.857,78.273) v1@25.857,78.105 ; v1(26.238,76.091) 26.92,76.091 ; U6.18@26.51,78.105 v1@25.857,78.105 ; U6.18@26.86,78.105 v1@25.857,78.105 ; U6.1@27.91,75.405 v1(27.91,74.752) U6.1@27.91,75.755 ; 26.92,76.091 26.92,76.805 U6.20@26.86,76.805 26.92,76.091
  Top Layer w0.35: v1@25.527,77.455 U6.19@26.86,77.455 v1(25.527,77.47) ; v1@25.527,77.455 v1(25.527,77.47) ; v1@25.527,77.455 26.51,77.455 v1(25.527,77.47)
  Top Layer w0.508: U29.1@8.956,75.031 v1(8.956,74.228) U29.1@8.956,75.281 ; v1(9.144,24.384) 9.202,24.442 C100.1@9.876,24.442 ; C79.2@9.558,72.898 v1(8.763,72.898) C79.2@9.583,72.898 ; C100.1@9.906,24.417 U31.1@9.876,22.982 C100.1@9.876,24.442 ; C100.1@9.906,24.442 C100.1@9.876,24.442 ; C99.1@9.906,62.009 U30.1@9.876,60.574 9.876,62.034 C99.1@9.906,62.034 ; C99.1@9.906,62.105 C99.1@9.906,62.034 ; v1@10.9,62.3 10.634,62.034 C99.1@9.906,62.034 ; C6.1@21.336,78.168 v1(21.336,76.738) ; C6.1@22.013,77.998 v1(21.336,76.738) ; v1(22.225,45.593) JP2.1@23.33,45.593 ; R42.1@24.384,76.2 v1(24.384,75.341) R42.1@24.384,76.302 ; U23.5@30.912,6.223 v1(31.75,6.223) ; v1(21.336,76.738) 20.659,77.998 v1(21.336,76.738) ; v1(26.035,25.019) C60.1@26.035,24.028 v1(26.035,25.019) ; v1(26.035,25.019) 26.035,24.13 v1(26.035,25.019) ; v1(26.162,62.611) C16.1@26.162,61.62 v1(26.162,62.611) ; v1(26.162,62.611) 26.162,61.722 v1(26.162,62.611) ; v1(31.75,6.223) U23.5@30.687,6.223 v1(31.75,6.223) ; v1(22.098,7.874) JP3.1@23.33,7.874 v1(22.098,7.874)
  Bottom Layer w0.33: v1(18.669,51.435) 18.732,51.435 19.113,51.054 ; 19.113,10.63 U34.24@19.113,11.786 ; 19.113,11.022 v1(19.177,9.144) 19.113,9.144 U34.24@19.113,12.446 ; U35.24@19.113,50.038 19.113,51.054 ; U35.24@19.113,50.698 19.113,51.054 ; U34.21@21.018,13.106 v1@21.018,13.97 ; v1@21.018,13.97 U34.21@21.018,12.446 v1(20.955,13.97) v1@21.018,13.97
  Bottom Layer w0.508: R20.1@13.183,17.145 R20.1@13.208,17.145 ; R20.1@13.183,17.145 v1(13.208,18.034) ; R20.1@13.183,17.145 v1(13.208,18.034) ; R19.1@13.183,54.483 R19.1@13.208,54.483 ; R19.1@13.183,54.483 v1(13.208,55.372) ; R19.1@13.183,54.483 v1(13.208,55.372) ; R20.1@13.208,17.145 v1(13.208,18.034) ; R20.1@13.208,17.145 v1(13.208,18.034) ; R19.1@13.208,54.483 v1(13.208,55.372) ; R19.1@13.208,54.483 v1(13.208,55.372) ; v1(17.145,18.004) C35.1@17.145,16.706 v1(17.145,18.004) ; v1(17.145,18.004) 17.145,16.731 v1(17.145,18.004) ; v1(17.145,55.723) C34.1@17.145,54.425 v1(17.145,55.723) ; v1(17.145,55.723) 17.145,54.45 v1(17.145,55.723) ; C31.2@29.337,5.9 31.369,5.9 31.692,6.223 v1(31.75,6.223) C31.2@29.337,5.9
  other v1: 10.922,62.357
+5V: C5.1 C32.1 C36.1 C37.2 C59.1 C83.1 C102.1 C107.2 C110.1 C116.1 L4.2 R12.1 R24.2 R25.2 R26.2 R44.1 R50.1 R52.1 U1.8 U5.10 U6.5 U6.6 U6.7 U6.8 U6.10 U7.10 U9.1 U9.8 U10.1 U10.3 U28.7 U36.1 U36.3 | length 89
  Top Layer w0.152: C5.1@33.363,76.816 C5.1@33.363,77.089
  Top Layer w0.3: U7.10@56.198,77.373 56.898,77.373 57.025,77.5 57.025,77.978 57.025,77.98 v1@57.025,78 ; v1(73.45,74.05) v1@73.5,74 ; v1@73.47,74.06 v1@73.5,74 ; v1@73.5,74 74.011,73.489 U5.10@74.011,72.962 v1@73.5,74
  Top Layer w0.305: U6.6@31.56,76.805 31.56,76.816 v1(32.512,76.816) U6.6@31.91,76.805 ; U6.7@31.56,77.455 31.56,77.47 v1(32.512,77.47) U6.7@31.91,77.455 ; U6.8@31.56,78.105 32.258,78.105 ; U6.8@31.91,78.105 32.258,78.105 ; v1(32.512,78.359) 32.258,78.105
  Top Layer w0.35: U6.10@31.56,79.405 32.947,79.405 ; U6.10@31.91,79.405 32.947,79.405 ; C5.1@33.071,78.408 33.363,78.989 ; C5.1@33.363,77.089 33.363,77.47 33.363,78.359 33.363,78.989 ; C5.1@33.363,78.339 33.363,78.989 ; C5.1@33.655,78.408 33.363,78.989 ; 32.947,79.405 33.363,78.989 ; U6.5@30.51,75.692 v1(31.115,75.692) U6.5@30.51,75.755 U6.5@30.51,75.692
  Top Layer w0.4: v1(71.12,8.763) 71.879,8.804 71.12,8.804 U1.8@72.279,8.804 v1(71.12,8.763)
  Top Layer w0.5: v1(57.023,77.978) v1@57.025,77.98 ; v3(60.525,79.1) v3@60.675,79.1 ; C116.1@61.2,78.6 v3@60.7,79.1 ; C116.1@61.2,79.625 60.887,79.312 v3@60.675,79.1 ; C116.1@61.45,78.75 61.275,78.925 61.275,79.1 v3@60.7,79.1 ; C116.1@61.5,78.25 C116.1@61.5,78.75 ; C59.1@70.25,70.3 70.95,70.3 71.15,70.5 71.075,70.575 v3(71.075,71.2) ; C59.1@70.7,70.625 71.075,71 v3(71.075,71.2) ; C59.1@71.475,70.625 71.075,71.025 v3(71.075,71.2) ; v3@60.675,79.1 v3@60.7,79.1
  Top Layer w0.508: U36.3@18.618,26.101 v1(17.78,26.162) 18.832,26.162 U36.3@18.893,26.101 ; C5.1@33.363,76.816 v1(32.512,76.816) C5.1@33.363,77.089 ; C5.1@33.363,77.47 v1(32.512,77.47) C5.1@33.363,77.089 ; C5.1@33.363,78.339 v1(32.512,78.359) 33.363,78.359 33.401,78.359 C5.1@33.363,77.089 ; v1(71.12,8.763) v1@71.12,8.804 ; C37.2@72.423,6.858 v1(71.628,6.858) C37.2@72.448,6.858 ; R24.2@92.724,61.829 v1(91.865,61.829) R24.2@92.825,61.829 ; U9.8@94.361,76.835 v1(94.361,76.057) U9.8@94.361,77.31 ; U9.1@94.361,82.235 v1(94.361,81.407) U9.1@94.361,82.71 ; R50.1@96.774,77.216 v1(96.774,76.327) R50.1@96.774,77.318 ; R25.2@99.187,65.684 v1(99.187,66.675) R25.2@99.187,65.786 ; U28.7@100.722,61.778 v1(100.044,61.778) U28.7@101.097,61.778 ; C110.1@17.653,27.998 16.949,27.998 v1(16.891,27.94) C110.1@17.653,27.998 ; C110.1@17.653,27.998 C110.1@17.656,28.001 ; C110.1@17.653,27.998 U36.1@18.893,28.001 C110.1@17.656,28.001 ; C110.1@17.653,27.998 18.618,28.001 C110.1@17.656,28.001 ; C32.1@17.653,65.59 17.076,65.59 v1(17.018,65.532) C32.1@17.653,65.59 ; C32.1@17.653,65.59 C32.1@17.658,65.585 ; C32.1@17.653,65.59 U10.1@18.893,65.585 C32.1@17.658,65.585 ; C32.1@17.653,65.59 18.618,65.585 C32.1@17.658,65.585 ; v1(17.78,63.627) v1@17.838,63.685 ; v1(17.78,63.627) U10.3@18.893,63.685 v1@17.838,63.685 ; v1(17.78,63.627) 18.618,63.685 v1@17.838,63.685 ; v1(37.605,81.915) C107.2@36.452,81.915 v1(37.605,81.915) ; v1(37.605,81.915) 36.529,82.329 v1(37.605,81.915) ; v1(37.605,81.915) 36.529,81.501 v1(37.605,81.915) ; v1(72.263,61.468) R12.1@72.263,60.477 v1(72.263,61.468) ; v1(72.263,61.468) 72.263,60.579 v1(72.263,61.468) ; v1(75.565,61.468) R52.1@75.565,60.477 v1(75.565,61.468) ; v1(75.565,61.468) 75.565,60.579 v1(75.565,61.468) ; v1(96.914,60.945) R26.2@96.914,61.804 v1(96.914,60.945)
  Bottom Layer w0.508: R44.1@62.375,79.762 62.375,79.781 62.375,81.3 R44.1@62.375,79.864 ; C36.1@91.854,80.01 v1(90.581,80.01) C36.1@91.879,80.01 ; C83.1@103.686,58.937 v1@103.686,59.69 ; C83.1@103.686,58.937 v1@103.686,59.69 ; C83.1@103.686,58.937 v1(103.759,59.69) ; C83.1@103.686,58.937 v1(103.759,59.69) ; v1@103.686,59.69 v1(103.759,59.69)
  other v1: 93.772,11.222 95.209,11.222 96.646,11.222 98.083,11.222 99.52,11.222 94.491,11.941 95.928,11.941 97.364,11.941 98.801,11.941 93.772,12.659 95.209,12.659 96.646,12.659 98.083,12.659 99.52,12.659 100.957,12.659 102.393,12.659 94.491,13.378 95.928,13.378 97.364,13.378 98.801,13.378 100.238,13.378 101.675,13.378 93.772,14.096 95.209,14.096 96.646,14.096 98.083,14.096 99.52,14.096 100.957,14.096 102.393,14.096 94.491,14.814 95.928,14.814 97.364,14.814 98.801,14.814 100.238,14.814 101.675,14.814 103.112,14.814 93.772,15.533 95.209,15.533 96.646,15.533 98.083,15.533 99.52,15.533 100.957,15.533 102.393,15.533 94.491,16.251 95.928,16.251 97.364,16.251 98.801,16.251 100.238,16.251 101.675,16.251 103.112,16.251 93.772,16.97 95.209,16.97 96.646,16.97 98.083,16.97 99.52,16.97 100.957,16.97 102.393,16.97
  other v5: 62.375,81.325
CAL_3: U23.1 U34.13 | length 21
  Top Layer w0.152: v1@22.452,9.397 21.906,8.571 ; v1@22.732,9.117 21.906,8.571 ; U23.1@27.729,6.952 27.005,7.173 ; U23.1@27.729,7.394 27.005,7.173 ; U23.1@27.762,7.173 27.005,7.173 ; U23.1@27.987,7.173 22.013,7.173 21.543,7.644 21.543,8.208 v1(22.606,9.271) 21.906,8.571
  Bottom Layer w0.152: v1(22.606,9.271) 23.825,9.271 26.098,11.544 U34.13@26.098,12.446 ; v1@22.63,9.074 23.44,9.271 v1@22.63,9.468
CAL_19: R9.2 U19.30 U23.6 | length 73.6
  Top Layer w0.152: U23.6@30.687,7.173 63.942,7.173 65.278,8.509 65.278,9.906 70.993,15.621 70.993,24.079 ; U23.6@30.912,7.173 31.669,7.173 ; U23.6@30.945,6.952 31.669,7.173 ; U23.6@30.945,7.394 31.669,7.173 ; U19.30@72.839,32.493 72.839,32.44 73.914,32.44 ; R9.2@73.274,23.602 72.492,23.901 ; R9.2@73.274,24.201 72.492,23.901 ; R9.2@73.316,23.75 72.492,23.901 ; R9.2@73.316,24.053 72.492,23.901 ; R9.2@73.33,23.901 72.085,23.901 71.907,24.079 70.993,24.079 ; U19.30@73.489,32.493 73.914,32.44 ; 70.993,24.079 70.993,29.083 72.009,30.099 73.914,30.099 74.168,30.353 74.168,32.186 73.914,32.44
CALRUN_5: R12.2 U21.6 U35.13 | length 64.3
  Top Layer w0.152: v1@64.517,55.907 65.343,56.453 v1@64.797,55.627 ; v1(64.643,55.753) 65.485,56.595 U21.6@72.964,56.595 72.964,57.465 ; R12.2@71.967,58.728 72.263,58.166 ; R12.2@72.112,58.783 72.263,58.166 ; R12.2@72.263,58.801 72.263,58.166 ; R12.2@72.263,58.903 72.263,58.166 ; R12.2@72.414,58.783 72.263,58.166 ; R12.2@72.559,58.728 72.263,58.166 ; U21.6@72.744,56.859 72.964,57.465 ; U21.6@72.931,56.374 72.207,56.595 U21.6@72.931,56.816 ; U21.6@72.964,56.82 72.964,57.465 ; U21.6@73.184,56.859 72.964,57.465 ; 72.263,58.166 72.964,57.465
  Bottom Layer w0.152: U35.13@26.01,50.711 26.098,51.014 ; U35.13@26.098,50.038 26.098,51.014 ; U35.13@26.098,50.698 26.098,51.014 ; U35.13@26.187,50.711 26.098,51.014 ; v1@64.489,55.879 63.943,55.053 v1@64.769,55.599 ; v1(64.643,55.753) 61.087,52.197 27.281,52.197 26.098,51.014